# EAGLE board panel (EAGLE 5.11), part 1 of 3
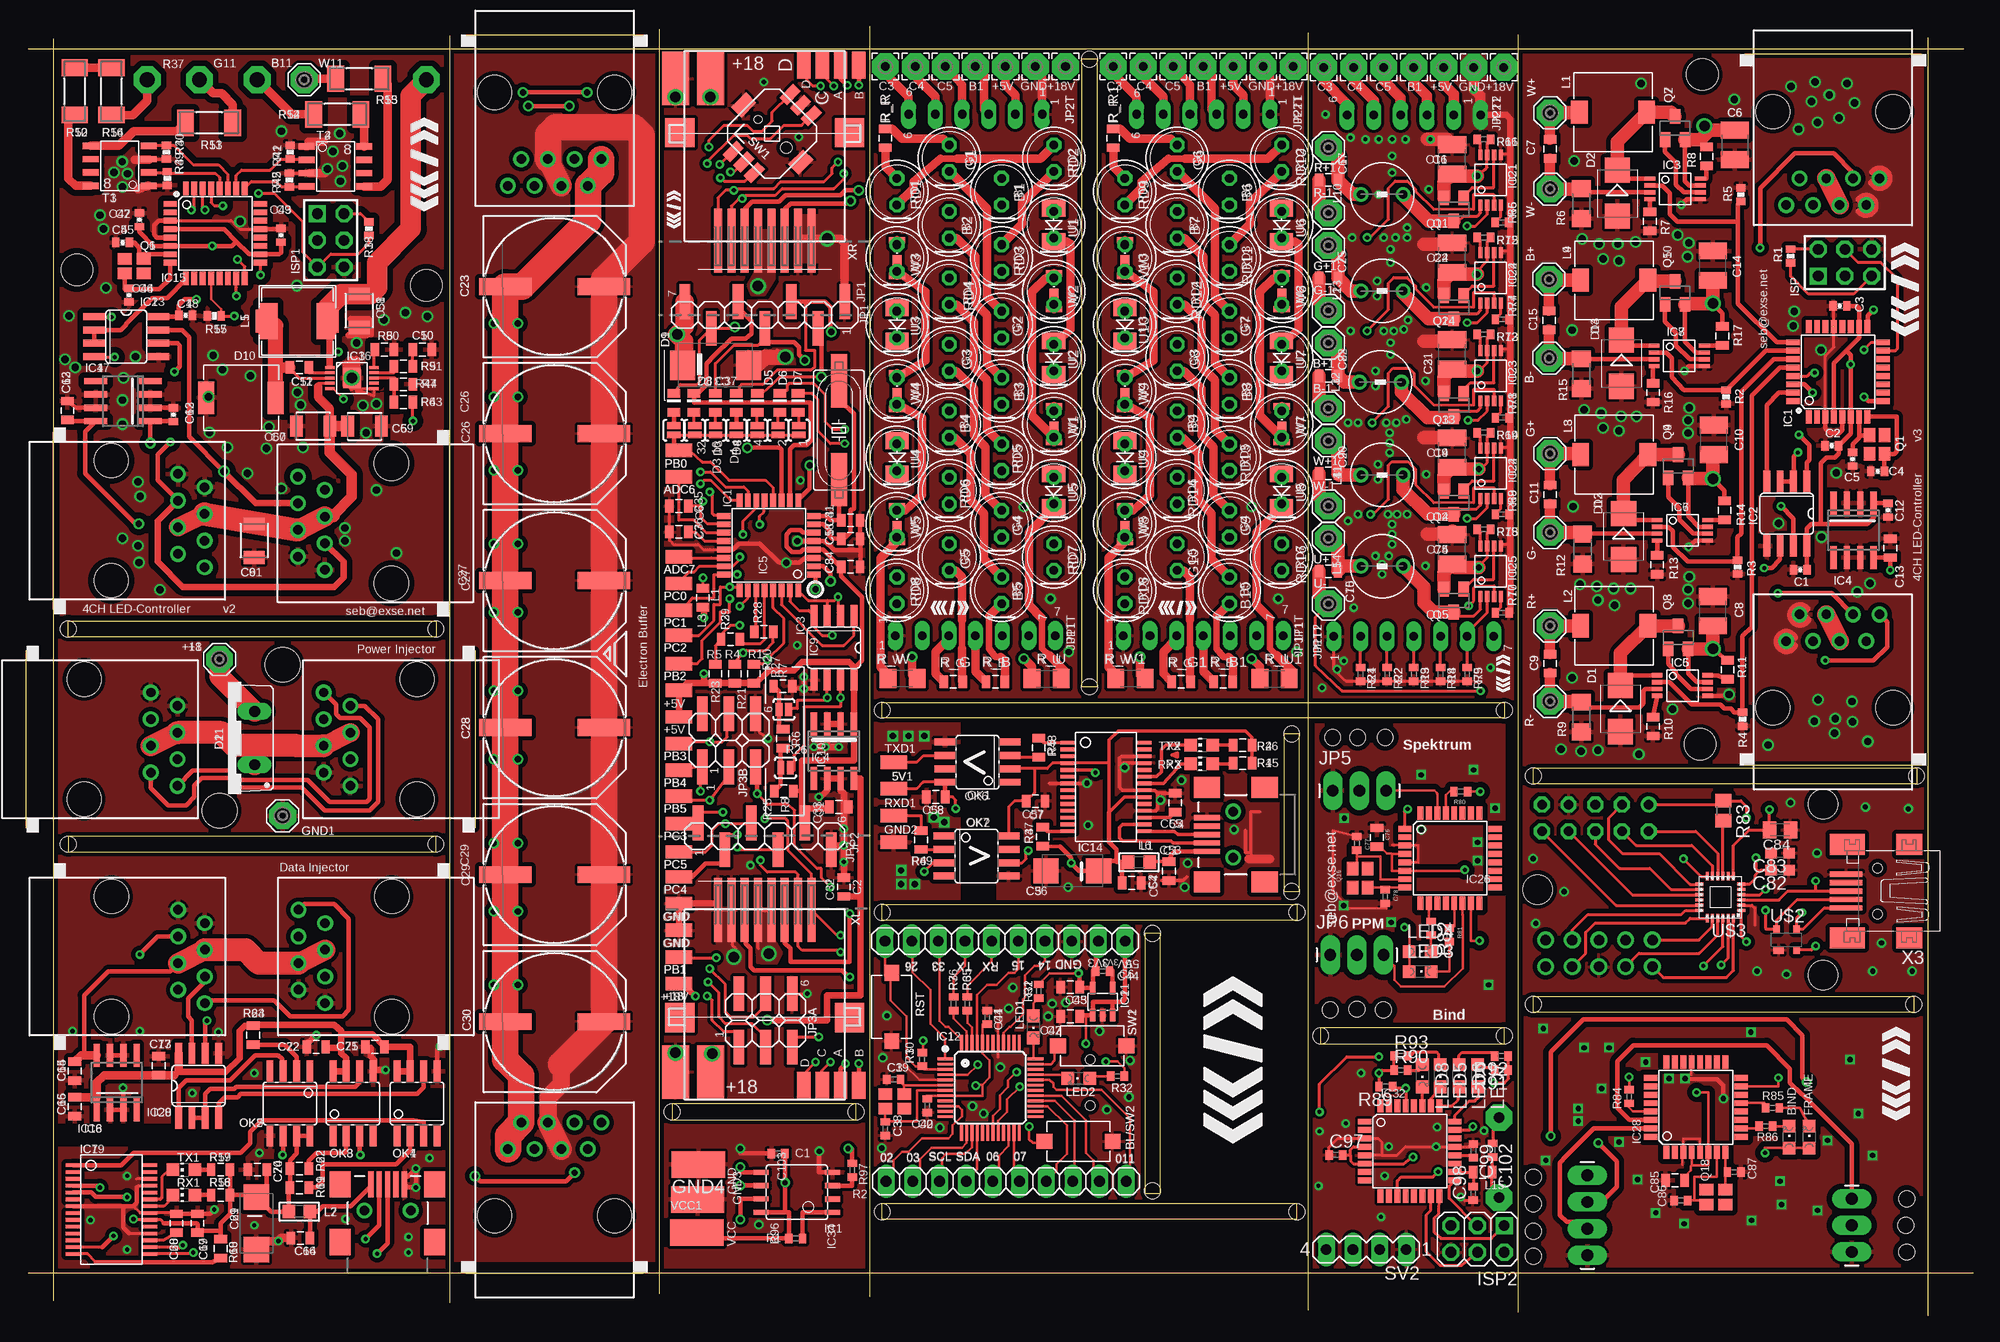
[diagram p0: board, top side]
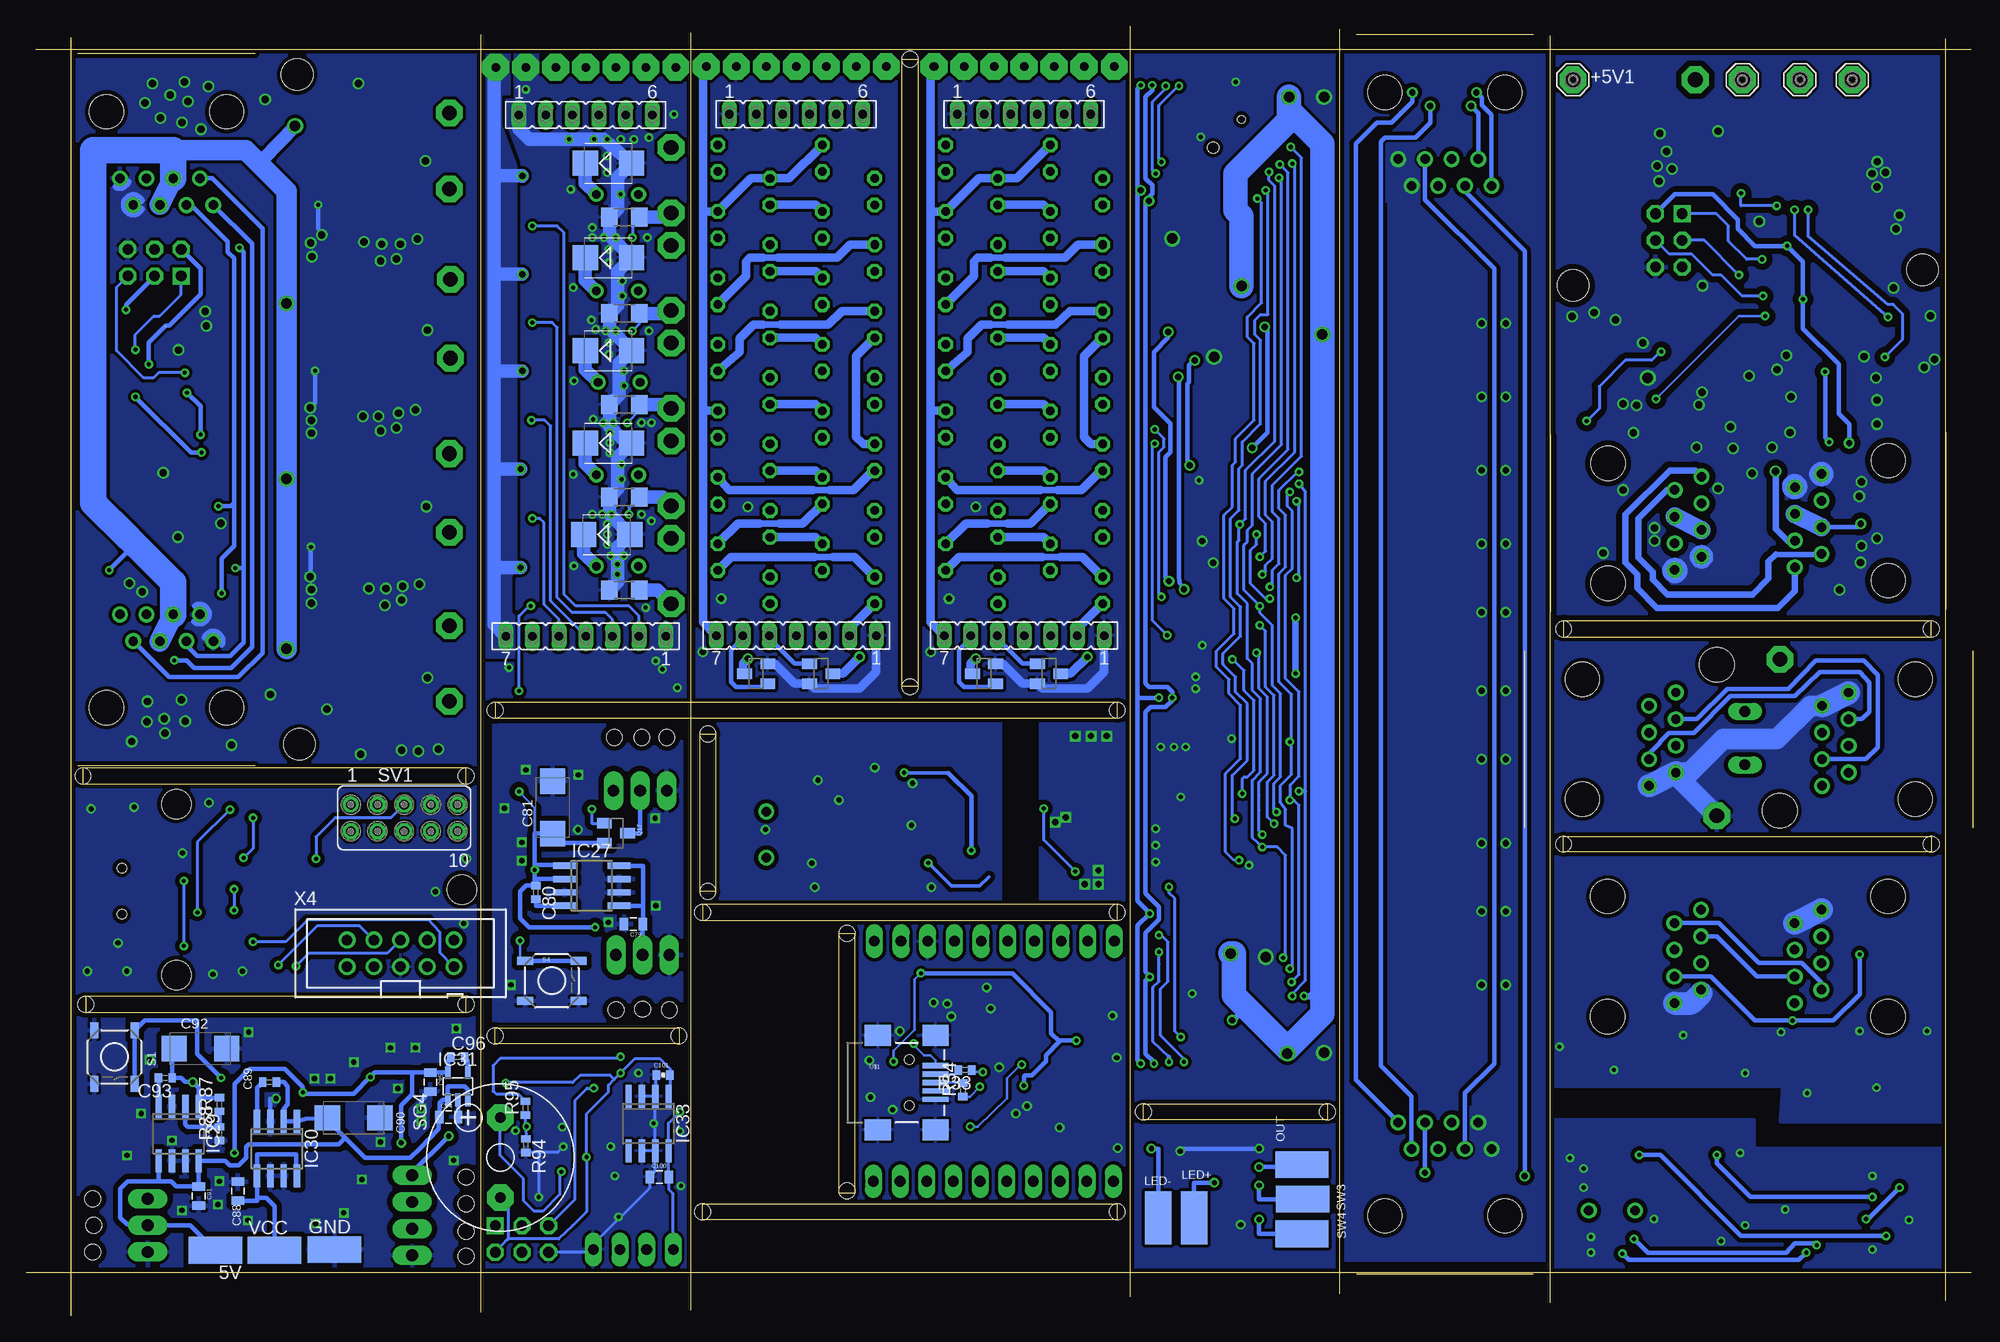
[diagram p1: board, bottom side, seen from below]

Size 185.41 x 122.8 mm. Coordinates in mm from the lower left corner, seen from the top.
Outline: 2.61,1.4 2.61,121.6
Outline: 40.31,121.9 40.31,1.2
Outline: 60.31,2.1 60.31,122.5
Outline: 80.31,122.8 80.31,1.8
Outline: 122.11,0.5 122.11,122.2
Outline: 184.51,120.6 0.21,120.6
Outline: 0.21,4.1 185.41,4.1
Outline: 142.11,0.3 142.11,122
Outline: 181.11,0 181.11,121.7
Outline: 143.51,52.15 180.01,52.15 180.01,50.65 143.51,50.65 143.51,52.15
Outline: 121.26,40.4 121.26,55.4 119.76,55.4 119.76,40.4 121.26,40.4
Outline: 121.01,37.65 81.51,37.65 81.51,39.15 121.01,39.15 121.01,37.65
Outline: 81.51,9.15 81.51,10.65 121.01,10.65 121.01,9.15 81.51,9.15
Outline: 61.51,18.65 79.01,18.65 79.01,20.15 61.51,20.15 61.51,18.65
Outline: 4.01,44.15 39.01,44.15 39.01,45.65 4.01,45.65 4.01,44.15
Outline: 4.01,66.15 39.01,66.15 39.01,64.65 4.01,64.65 4.01,66.15
Outline: 102.01,119.65 100.51,119.65 100.51,59.9 102.01,59.9 102.01,119.65
Outline: 81.51,58.4 140.76,58.4 140.76,56.9 81.51,56.9 81.51,58.4
Outline: 108.01,36.4 106.51,36.4 106.51,11.65 108.01,11.65 108.01,36.4
Outline: 123.26,25.9 140.76,25.9 140.76,27.4 123.26,27.4 123.26,25.9
Outline: 143.51,28.9 143.51,30.4 179.76,30.4 179.76,28.9 143.51,28.9
Copper layers (1*16): Top 0.035mm / dielectric 1.5mm / Bottom 0.035mm
Design rules "default *": minimum track width 0.2mm, minimum drill 0.4mm, track to track 0.2mm, track to pad 0.2mm, pad to pad 0.2mm, via to via 0.2mm, smd to smd 0mil, copper to edge 0.4mm, drill to drill 8mil, minimum pad ring 0.3mm, minimum via ring 8mil, stop-mask expansion 4mil, vias tented up to drill 40mil, thermal gap 10mil
Holes 3.3 mm at 18.41,48.1 24.41,62
Holes 3 mm at 38.11,98.1 4.81,99.6 159.41,54.4 159.61,118.2
Holes 1.5 mm at 124.17,29.12 126.72,29.2 129.25,29.12 124.41,55.07 126.79,55.07 129.41,55.07 179.07,6.06 179,8.6 179.07,11.14 143.51,5.66 143.51,8.04 143.51,10.66 143.51,13.2 4.01,65.4 39.01,65.4 4.01,44.9 39.01,44.9 61.51,19.4 79.01,19.4 81.51,9.9 121.01,9.9 81.51,38.4 121.01,38.4 120.51,40.4 120.51,55.4 143.51,51.4 180.01,51.4 107.26,11.9 107.26,36.4 81.51,57.65 140.76,57.65 101.26,59.9 101.26,119.65 123.26,26.65 140.76,26.65 143.51,29.65 179.76,29.65
Holes 2.8 mm at 171.13,48.72 171.13,32.45 143.93,40.59
tRestrict: 2 lines

## Footprints (pad centres in the part's own frame; a part is rotated, then mirrored left to right if it is on the bottom)
SMD2,54-5,08 = smd 2.54 x 5.08: 1 0,0
SMD1,27-2,54 = smd 1.27 x 2.54: 1 0,0
SE14 = drill 1.397 pad 2.54 octagon: MP 0,0
LED5MM = drill 0.813 octagon: A -1.27,0; K 1.27,0
CHIPLED_0805 = smd 1.2 x 1.2: A 0,-1.05; C 0,1.05
SWITCH_MCTAEF = smd 1.5 x 1.4: 1 -3.25,0; 2 3.25,0
0402-CAP = smd 0.7 x 0.9: 1 -0.65,0; 2 0.65,0
C1210 = smd 1.6 x 2.7: 1 -1.4,0; 2 1.4,0
0805 = smd 0.8 x 1.2: 1 -0.9,0; 2 0.9,0
PANASONIC_H13 = smd 5 x 1.6: + 4.7,0; - -4.7,0
SMC_D = smd 2.4 x 2.8: + -3.15,0; - 3.15,0
C0402 = smd 0.7 x 0.9: 1 -0.65,0; 2 0.65,0
1210 = smd 1.2 x 2: 1 -1.6,0; 2 1.6,0
SMC_C = smd 2.4 x 2.4: + -2.5,0; - 2.5,0
C0603 = smd 1.1 x 1: 1 -0.85,0; 2 0.85,0
C0805K = smd 1.3 x 1.6: 1 -1,0; 2 1,0
SMB = smd 2.4 x 2.4: A 2.2,0; C -2.2,0
DIODE_0805 = smd 0.8 x 1.2: 1 -0.9,0; 2 0.9,0
DO214AB = smd 1.52 x 3.07: A 3.305,0; K -3.305,0
TO220ACS = drill 1.016 long: A 2.54,-2.54; C -2.54,-2.54
TQFP32-08 = smd 1.27 x 0.559: 1 -4.293,2.8; 2 -4.293,2; 3 -4.293,1.2; 4 -4.293,0.4; 5 -4.293,-0.4; 6 -4.293,-1.2; 7 -4.293,-2; 8 -4.293,-2.8; 17 4.293,-2.8; 18 4.293,-2; 19 4.293,-1.2; 20 4.293,-0.4; 21 4.293,0.4; 22 4.293,1.2; 23 4.293,2; 24 4.293,2.8 | smd 0.559 x 1.27: 9 -2.8,-4.293; 10 -2,-4.293; 11 -1.2,-4.293; 12 -0.4,-4.293; 13 0.4,-4.293; 14 1.2,-4.293; 15 2,-4.293; 16 2.8,-4.293; 25 2.8,4.293; 26 2,4.293; 27 1.2,4.293; 28 0.4,4.293; 29 -0.4,4.293; 30 -1.2,4.293; 31 -2,4.293; 32 -2.8,4.293
SO08 = smd 0.66 x 2.032: 1 -1.905,-3.073; 2 -0.635,-3.073; 3 0.635,-3.073; 4 1.905,-3.073; 5 1.905,3.073; 6 0.635,3.073; 7 -0.635,3.073; 8 -1.905,3.073
MSOP8 = smd 0.41 x 1.02: 1 -0.975,-2.4; 2 -0.325,-2.4; 3 0.325,-2.4; 4 0.975,-2.4; 5 0.975,2.4; 6 0.325,2.4; 7 -0.325,2.4; 8 -0.975,2.4
SO08' = smd 0.6 x 2.2: 1 -1.905,-2.6; 2 -0.635,-2.6; 3 0.635,-2.6; 4 1.905,-2.6; 5 1.905,2.6; 6 0.635,2.6; 7 -0.635,2.6; 8 -1.905,2.6
SOT23-5L = smd 0.55 x 1.2: 1 -0.95,-1.3; 2 0,-1.3; 3 0.95,-1.3; 4 0.95,1.3; 5 -0.95,1.3
LQFP48 = smd 1.5 x 0.25: 1 -4.3,2.75; 2 -4.3,2.25; 3 -4.3,1.75; 4 -4.3,1.25; 5 -4.3,0.75; 6 -4.3,0.25; 7 -4.3,-0.25; 8 -4.3,-0.75; 9 -4.3,-1.25; 10 -4.3,-1.75; 11 -4.3,-2.25; 12 -4.3,-2.75; 25 4.3,-2.75; 26 4.3,-2.25; 27 4.3,-1.75; 28 4.3,-1.25; 29 4.3,-0.75; 30 4.3,-0.25; 31 4.3,0.25; 32 4.3,0.75; 33 4.3,1.25; 34 4.3,1.75; 35 4.3,2.25; 36 4.3,2.75 | smd 0.25 x 1.5: 13 -2.75,-4.3; 14 -2.25,-4.3; 15 -1.75,-4.3; 16 -1.25,-4.3; 17 -0.75,-4.3; 18 -0.25,-4.3; 19 0.25,-4.3; 20 0.75,-4.3; 21 1.25,-4.3; 22 1.75,-4.3; 23 2.25,-4.3; 24 2.75,-4.3; 37 2.75,4.3; 38 2.25,4.3; 39 1.75,4.3; 40 1.25,4.3; 41 0.75,4.3; 42 0.25,4.3; 43 -0.25,4.3; 44 -0.75,4.3; 45 -1.25,4.3; 46 -1.75,4.3; 47 -2.25,4.3; 48 -2.75,4.3
SSOP28DB = smd 0.348 x 1.397: 1 -4.225,-3.656; 2 -3.575,-3.656; 3 -2.925,-3.656; 4 -2.275,-3.656; 5 -1.625,-3.656; 6 -0.975,-3.656; 7 -0.325,-3.656; 8 0.325,-3.656; 9 0.975,-3.656; 10 1.625,-3.656; 11 2.275,-3.656; 12 2.925,-3.656; 13 3.575,-3.656; 14 4.225,-3.656; 15 4.225,3.656; 16 3.575,3.656; 17 2.925,3.656; 18 2.275,3.656; 19 1.625,3.656; 20 0.975,3.656; 21 0.325,3.656; 22 -0.325,3.656; 23 -0.975,3.656; 24 -1.625,3.656; 25 -2.275,3.656; 26 -2.925,3.656; 27 -3.575,3.656; 28 -4.225,3.656
MSOP10-PAD = smd 0.305 x 0.889: 1 -1,-2.095; 2 -0.5,-2.095; 3 0,-2.095; 4 0.5,-2.095; 5 1,-2.095; 6 1,2.095; 7 0.5,2.095; 8 0,2.095; 9 -0.5,2.095; 10 -1,2.095 | smd 1.88 x 1.68: PAD 0,0
SOIC8 = smd 0.6 x 2.2: 1 -1.905,-2.6; 2 -0.635,-2.6; 3 0.635,-2.6; 4 1.905,-2.6; 5 1.905,2.6; 6 0.635,2.6; 7 -0.635,2.6; 8 -1.905,2.6
8S2 = smd 0.5 x 1.4: 1 -1.905,-3.404; 2 -0.645,-3.404; 3 0.625,-3.404; 4 1.895,-3.404; 5 1.905,3.404; 6 0.635,3.404; 7 -0.635,3.404; 8 -1.905,3.404
AVR-ISP-6 = drill 1.016 square: 1 -2.54,-1.27 | drill 1.016 octagon: 2 -2.54,1.27; 3 0,-1.27; 4 0,1.27; 5 2.54,-1.27; 6 2.54,1.27
2X03 = drill 1.016 square: 1 -2.54,-1.27 | drill 1.016 octagon: 2 -2.54,1.27; 3 0,-1.27; 4 0,1.27; 5 2.54,-1.27; 6 2.54,1.27
1X07SMD-REVERSE = smd 1.016 x 3.302: 1 -1.27,-1.27; 2 1.27,1.27; 3 3.81,-1.27; 4 6.35,1.27; 5 8.89,-1.27; 6 11.43,1.27; 7 13.97,-1.27
FE07 = drill 0.813 long: 1 -7.62,0; 2 -5.08,0; 3 -2.54,0; 4 0,0; 5 2.54,0; 6 5.08,0; 7 7.62,0
1X06SMD = smd 1.016 x 3.302: 1 -1.27,1.27; 2 1.27,-1.27; 3 3.81,1.27; 4 6.35,-1.27; 5 8.89,1.27; 6 11.43,-1.27
FE06 = drill 0.813 long: 1 -6.35,0; 2 -3.81,0; 3 -1.27,0; 4 1.27,0; 5 3.81,0; 6 6.35,0
1X10 = drill 1.016 long: 1 -11.43,0; 2 -8.89,0; 3 -6.35,0; 4 -3.81,0; 5 -1.27,0; 6 1.27,0; 7 3.81,0; 8 6.35,0; 9 8.89,0; 10 11.43,0
2X03SMD = smd 1.016 x 3.302: 1 -1.27,-3.81; 2 -1.27,1.27; 3 1.27,-3.81; 4 1.27,1.27; 5 3.81,-3.81; 6 3.81,1.27
1X03_LONGPADS = drill 1.118 pad 1.88 long: 1 0,0; 2 2.54,0; 3 5.08,0
PIS2816 = smd 2.2 x 1.6: P$1 0,3.2; P$2 0,-3.2
IHLP-2525CZ = smd 1.83 x 3.43: P$1 -2.77,0; P$2 2.77,0
X22 = smd 1.3 x 1.1: 1 0.9,0.7; 2 -0.9,0.7; 3 -0.9,-0.7; 4 0.9,-0.7
RLF7030 = smd 2 x 2.2: P$1 -2.95,0; P$2 2.95,0
L0805 = smd 1.2 x 1.3: 1 -1.016,0; 2 1.016,0
WE-TI_S/M = drill 0.813 round: 1 -2,0; 2 2,0
SOIC08 = smd 0.66 x 2.032: 1 -1.905,-3.073; 2 -0.635,-3.073; 3 0.635,-3.073; 4 1.905,-3.073; 5 1.905,3.073; 6 0.635,3.073; 7 -0.635,3.073; 8 -1.905,3.073
2,54/0,8 = drill 0.813 pad 2.54 octagon: 1 0,0
SOT23 = smd 1 x 1.4: 1 -0.95,-1.1; 2 0.95,-1.1; 3 0,1.1
0402-RES = smd 0.7 x 0.9: 1 -0.65,0; 2 0.65,0
R1206 = smd 1.6 x 1.803: 1 -1.422,0; 2 1.422,0
R0402 = smd 0.7 x 0.9: 1 -0.65,0; 2 0.65,0
MINI_MELF-0207R = smd 1.6 x 2.5: 1 -2.25,0; 2 2.25,0
R0805 = smd 1.3 x 1.5: 1 -0.95,0; 2 0.95,0
1206 = smd 1.6 x 1.8: 1 -1.4,0; 2 1.4,0
CHIP-LED0805 = smd 1.2 x 1.2: A 0,-1.05; C 0,1.05
TACTILE_SWITCH_SMD = smd 1.524 x 0.762: 1 -2.54,1.905; 2 2.54,1.905; 3 -2.54,-1.905; 4 2.54,-1.905
F/CM12P = drill 1.016 pad 2.54 octagon: + 3.81,0; - -3.81,0
SJ_2S-NO = smd 0.635 x 1.27: 1 -0.45,0; 2 0.45,0
1X04_LONGPADS = drill 1.118 pad 1.88 long: 1 0,0; 2 2.54,0; 3 5.08,0; 4 7.62,0
FE05-2 = drill 0.914 round: 1 -5.08,1.27 | drill 0.914 octagon: 2 -5.08,-1.27; 3 -2.54,1.27; 4 -2.54,-1.27; 5 0,1.27; 6 0,-1.27; 7 2.54,1.27; 8 2.54,-1.27; 9 5.08,1.27; 10 5.08,-1.27
MA04-1 = drill 1.016 long: 1 -3.81,0; 2 -1.27,0; 3 1.27,0; 4 3.81,0
MCMT5-F-V_ADAPTED = smd 1.858 x 1: 1 -3.829,1.425; 2 -3.829,0; 3 -3.829,-1.425; 4 3.829,1.425; 5 3.829,0; 6 3.829,-1.425 | smd 2 x 1.394: TAB1 0,3.847; TAB2 0,-3.847 | hole 1.05: 0,-1.9 | hole 0.75: 0,1.9
SO-8 = smd 1.524 x 0.61: 1 -2.743,1.27; 2 -2.743,0; 3 -2.743,-1.27; 4 -2.743,-2.54; 5 2.743,-2.54; 6 2.743,-1.27; 7 2.743,0; 8 2.743,1.27
PLCC2 = smd 1.6 x 2.2: P$1 -1.6,0; P$2 1.6,0
USB-MINIB = smd 2.5 x 0.5: D+ 2.5,0; D- 2.5,0.8; GND 2.5,-1.6; ID 2.5,-0.8; VBUS 2.5,1.6 | smd 2.5 x 2: MTN1 -3,4.5; MTN2 2.5,4.5; MTN3 -3,-4.5; MTN4 2.5,-4.5 | hole 0.9: 0,2.2; 0,-2.2
SOT143-R = smd 1 x 0.7: 1 -0.75,-1 | smd 0.6 x 0.7: 2 0.95,-1; 3 0.95,1; 4 -0.95,1
S-PQFP-N24(RGE) = smd 0.8 x 0.3: 1 -2.5,1.75; 2 -2.5,1.25; 3 -2.5,0.75; 4 -2.5,0.25; 5 -2.5,-0.25; 6 -2.5,-0.75; 13 1.5,-0.75; 14 1.5,-0.25; 15 1.5,0.25; 16 1.5,0.75; 17 1.5,1.25; 18 1.5,1.75 | smd 0.3 x 0.8: 7 -1.75,-1.5; 8 -1.25,-1.5; 9 -0.75,-1.5; 10 -0.25,-1.5; 11 0.25,-1.5; 12 0.75,-1.5; 19 0.75,2.5; 20 0.25,2.5; 21 -0.25,2.5; 22 -0.75,2.5; 23 -1.25,2.5; 24 -1.75,2.5
NICHIA_NSSL157T-H3 = smd 0.64 x 0.86: A@1 1.08,0 | smd 0.6 x 1.55: A@2 1.7,0; K@1 -1.7,0 | smd 1.66 x 0.86: K@2 -0.57,0
RJ45-NO-SHIELD = drill 0.9 pad 1.4 round: 1 -4.445,6.35; 2 -3.175,8.89; 3 -1.905,6.35; 4 -0.635,8.89; 5 0.635,6.35; 6 1.905,8.89; 7 3.175,6.35; 8 4.445,8.89 | hole 3.251: -5.715,0; 5.715,0
32005-301 = smd 3.1 x 0.5: 1 3,1.6; 2 3,0.8; 3 3,0; 4 3,-0.8; 5 3,-1.6 | smd 2.5 x 2: M1 -3,-4.45; M2 -3,4.45 | smd 3.3 x 2: M3 2.9,4.45; M4 2.9,-4.45 | hole 0.9: 0,2.2; 0,-2.2
PAK100/2500-10 = drill 1 pad 1.422 round: 1 -5.08,-1.27; 2 -5.08,1.27; 3 -2.54,-1.27; 4 -2.54,1.27; 5 0,-1.27; 6 0,1.27; 7 2.54,-1.27; 8 2.54,1.27; 9 5.08,-1.27; 10 5.08,1.27
HC49UP-SMALL = smd 5.08 x 1.524: 1 -4.699,0; 2 4.699,0
USB-MINIB-NOSTOP = smd 2.5 x 0.5: D+ 2.5,0; D- 2.5,0.8; GND 2.5,-1.6; ID 2.5,-0.8; VBUS 2.5,1.6 | smd 2.5 x 2: G1 -3,-4.5; G2 -3,4.5; G3 2.5,4.5; G4 2.5,-4.5 | drill 0.9 pad 0.8 round: H1 0,2.2 | drill 0.9 pad 0.787 round: H2 0,-2.2
85502-5008-SMALL = smd 6.096 x 0.762: 1 10.211,4.445; 2 10.211,3.175; 3 10.211,1.905; 4 10.211,0.635; 5 10.211,-0.635; 6 10.211,-1.905; 7 10.211,-3.175; 8 10.211,-4.445 | smd 2.794 x 2.794: P$1 -0.076,-8.077; P$2 -0.076,8.077

## Placement (x,y rotation side)
5V  [SMD2,54-5,08]  167.41,6.21 90 bottom
5V1  [SMD1,27-2,54]  82.61,50.17 270 top
+1  SE14  [SE14]  18.41,62.5 0 top
+5V1  SE14  [SE14]  38.11,117.7 0 bottom
+18_L  [SMD2,54-5,08]  65.16,23.2 180 top
+18_R  [SMD2,54-5,08]  65.16,117.82 180 top
A_L  [SMD1,27-2,54]  77.54,21.93 180 top
A_R  [SMD1,27-2,54]  77.54,119.09 180 top
ADC6  WIREPADSMD1,27-254  [SMD1,27-2,54]  62.15,79.88 90 top
ADC7  WIREPADSMD1,27-254  [SMD1,27-2,54]  62.15,72.26 270 top
B1  [LED5MM]  92.88,107.06 270 top
B2  [LED5MM]  87.9,103.89 270 top
B3  [LED5MM]  92.88,88.07 270 top
B4  [LED5MM]  87.9,84.9 270 top
B5  [LED5MM]  92.88,69.08 270 top
B6  [LED5MM]  114.58,107.06 270 top
B7  [LED5MM]  109.6,103.89 270 top
B8  [LED5MM]  114.58,88.07 270 top
B9  [LED5MM]  109.6,84.9 270 top
B10  [LED5MM]  114.58,69.08 270 top
B11  SE14  [SE14]  21.98,117.7 0 bottom
B+  SE14  [SE14]  145.01,98.7 90 top
B+1  SE14  [SE14]  124.01,92.64 270 top
B-  SE14  [SE14]  145.01,91.2 90 top
B-1  SE14  [SE14]  124.01,86.41 270 top
B_L  [SMD1,27-2,54]  79.29,21.93 180 top
B_R  [SMD1,27-2,54]  79.29,119.09 180 top
BIND  [CHIPLED_0805]  167.88,17.01 0 top
BL/SW2  SWITCH_MCTAEF  [SWITCH_MCTAEF]  100.21,16.6 180 top
C  WIREPADSMD1,27-254  [SMD1,27-2,54]  75.8,119.09 180 top
C1  100nF  [0402-CAP]  168.94,71.05 180 top
C2  100nF  [0402-CAP]  171.95,82.86 180 top
C3  100nF  [0402-CAP]  172.72,96.15 180 top
C4  22pF  [0402-CAP]  176.3,80.42 0 top
C5  22pF  [0402-CAP]  173.92,81.56 90 top
C6  2.2µF / 50V  [C1210]  162.71,111.5 270 top
C7  1µF  [0805]  145.11,111.1 90 top
C8  2.2µF / 50V  [C1210]  160.61,67.1 90 top
C9  1µF  [0805]  145.11,62.1 90 top
C10  2.2µF / 50V  [C1210]  160.71,83.4 90 top
C11  1µF  [0805]  145.11,78.2 90 top
C12  100nF  [0402-CAP]  177.31,76.7 90 top
C13  1µF  [0805]  177.51,73.1 270 top
C14  2.2µF / 50V  [C1210]  160.61,100 90 top
C15  1µF  [0805]  145.01,94.8 90 top
C16  2.2µF / 50V  [C1210]  135.79,110.13 90 top
C17  1µF  [0805]  124.01,108.16 0 top
C18  22p  [0805]  78.5,75.75 180 top
C19  2.2µF / 50V  [C1210]  135.79,82.19 90 top
C20  1µF  [0805]  124.01,80.22 0 top
C21  2.2µF / 50V  [C1210]  135.79,91.56 90 top
C22  1µF  [0805]  124.01,89.51 0 top
C23  [PANASONIC_H13]  50.31,98 0 top
C24  2.2µF / 50V  [C1210]  135.79,100.77 90 top
C25  1µF  [0805]  124.01,98.83 0 top
C26  [PANASONIC_H13]  50.31,84 0 top
C27  [PANASONIC_H13]  50.31,70 0 top
C28  [PANASONIC_H13]  50.31,56 0 top
C29  [PANASONIC_H13]  50.31,42 0 top
C30  [PANASONIC_H13]  50.31,28 0 top
C31  22p  [0805]  78.5,74 180 top
C32  1u  [0805]  77.86,40.82 90 top
C33  100n  [0805]  77.39,48.44 0 top
C34  100n  [0805]  78.5,71.3 0 top
C35  100n  [0805]  62.15,77.1 0 top
C36  100n  [0805]  62.15,74.64 0 top
C37  [SMC_D]  65.64,90.51 0 top
C38  22pF  [C0402]  81.81,17.8 90 top
C39  22pF  [C0402]  82.61,22.5 0 top
C40  100nF  [C0402]  85.81,20 90 top
C41  100nF  [C0402]  91.51,28.4 270 top
C42  1µF  [0805]  99.41,28.5 180 top
C43  10µF  [0805]  99.41,31.3 180 top
C44  10nF  [C0402]  102.51,32.8 0 top
C45  22pF  [0402-CAP]  9.17,102.19 0 top
C46  22pF  [0402-CAP]  9.79,97.19 90 top
C47  100nF  [0402-CAP]  10.77,104.36 90 top
C48  100nF  [0402-CAP]  15.18,95.25 0 top
C49  100nF  [0402-CAP]  24.26,102.89 90 top
C50  680pF  [0805]  37.71,92 180 top
C51  47µF 16V  [1210]  31.71,95.7 270 top
C52  1µF  [0805]  26.01,90.3 0 top
C53  10nF  [0805]  108.82,42.34 270 top
C54  100nF  [0805]  105.26,41.21 0 top
C55  100nF  [0805]  109.4,48.84 90 top
C56  4.7µF  [SMC_C]  99.62,42.36 180 top
C57  100nF  [0805]  96.11,49 180 top
C58  100nF  [0805]  86.61,49.4 180 top
C59  4.7µF 50V  [1210]  32.21,84.7 0 top
C60  4.7µF 50V  [1210]  27.31,84.7 180 top
C61  4.7µF 50V  [1210]  21.71,73.8 270 top
C62  1µF  [0805]  3.91,86.2 270 top
C63  100nF  [0402-CAP]  14.01,85.8 270 top
C64  1uF  [0805]  4.61,23.3 90 top
C65  100nF  [0805]  4.61,19.9 90 top
C66  10nF  [0805]  26.11,7.4 180 top
C67  100nF  [0805]  16.31,8.8 90 top
C68  100nF  [0805]  14.31,8.8 90 top
C69  4.7µF  [SMC_C]  21.91,8.8 270 top
C70  100nF  [0805]  22.01,13.9 0 top
C71  100nF  [0805]  33.21,25.6 180 top
C72  100nF  [0805]  27.61,25.6 180 top
C73  100nF  [0805]  12.61,23.8 90 top
C74  2.2µF / 50V  [C1210]  135.79,72.98 90 top
C75  1µF  [0805]  124.01,70.89 0 top
C76  100n  [0805]  128.62,45.55 90 top
C77  22n  [C0402]  126.72,44.99 270 top
C78  22n  [C0402]  129.41,39.91 90 top
C79  1µF  [0805]  127.59,37.29 180 bottom
C80  10nF  [C0402]  136.87,40.31 270 bottom
C81  [SMC_C]  135.29,48.41 90 bottom
C82  [C0603]  167.01,42.44 180 top
C83  [C0603]  167.01,44.06 180 top
C84  [C0805K]  167,46.27 180 top
C85  100n  [0805]  157.01,12.88 180 top
C86  22p  [C0402]  157.56,10.98 0 top
C87  22p  [C0402]  162.64,13.67 180 top
C88  1µF  [0805]  165.26,11.85 90 bottom
C89  10nF  [C0402]  162.25,22.25 180 bottom
C90  10µF  [SMC_C]  154.23,18.83 0 bottom
C91  1µF  [0805]  168.99,11.37 270 bottom
C92  10µF  [SMC_C]  168.84,25.42 0 bottom
C93  10nF  [C0402]  172.17,22.64 180 bottom
C94  1µF  [0805]  145.18,18.91 0 bottom
C95  10µF  [0805]  146.93,22.25 270 bottom
C96  10nF  [C0402]  144.31,24.63 0 bottom
C97  [C0402]  124.71,15.31 0 top
C98  [C0402]  137.78,11.65 90 top
C99  [C0402]  137.81,15.7 270 top
C100  1µF  [0805]  125.12,13.21 0 bottom
C101  100nF  [0402-CAP]  124.76,22.91 0 bottom
C102  [C0402]  139.62,15.76 270 top
C103  [C0402]  71.6,15.45 0 top
C_L  WIREPADSMD1,27-254  [SMD1,27-2,54]  75.8,21.93 180 top
D  WIREPADSMD1,27-254  [SMD1,27-2,54]  74.05,119.09 180 top
D1  MBRS140  [SMB]  151.81,57.8 270 top
D2  MBRS140  [SMB]  151.51,106.9 270 top
D3  [DIODE_0805]  65.64,86.94 270 top
D4  [DIODE_0805]  67.62,86.94 270 top
D5  [DIODE_0805]  69.61,86.94 270 top
D6  [DIODE_0805]  71.75,86.94 270 top
D7  [DIODE_0805]  73.5,86.94 270 top
D8  [DIODE_0805]  63.57,86.94 270 top
D9  [DIODE_0805]  61.67,86.94 270 top
D10  MBRS340  [DO214AB]  20.46,87.41 180 top
D11  [TO220ACS]  19.21,55 90 top
D12  MBRS140  [SMB]  152.11,74.2 270 top
D13  MBRS140  [SMB]  151.91,90.7 270 top
D14  MBRS140  [SMB]  129.98,109.76 0 bottom
D15  MBRS140  [SMB]  129.98,83.09 0 bottom
D16  MBRS140  [SMB]  129.98,91.91 0 bottom
D17  MBRS140  [SMB]  129.98,100.75 0 bottom
D18  MBRS140  [SMB]  130.14,74.39 0 bottom
D_L  WIREPADSMD1,27-254  [SMD1,27-2,54]  74.05,21.93 0 top
FRAME  [CHIPLED_0805]  169.79,17.01 0 top
G1  [LED5MM]  87.9,110.22 270 top
G2  [LED5MM]  92.88,94.4 270 top
G3  [LED5MM]  87.9,91.23 270 top
G4  [LED5MM]  92.88,75.41 270 top
G5  [LED5MM]  87.9,72.24 270 top
G6  [LED5MM]  109.6,110.22 270 top
G7  [LED5MM]  114.58,94.4 270 top
G8  [LED5MM]  109.6,91.23 270 top
G9  [LED5MM]  114.58,75.41 270 top
G10  [LED5MM]  109.6,72.24 270 top
G11  SE14  [SE14]  16.5,117.7 0 bottom
G+  SE14  [SE14]  145.11,82.1 90 top
G+1  SE14  [SE14]  124.01,101.93 270 top
G-  SE14  [SE14]  145.11,74.6 90 top
G-1  SE14  [SE14]  124.01,95.74 270 top
GND  [SMD2,54-5,08]  156.06,6.29 270 bottom
GND1  SE14  [SE14]  24.41,47.6 0 top
GND2  [SMD1,27-2,54]  82.61,45.09 270 top
GND3  [SMD2,54-5,08]  63.93,11.06 270 top
GND4  [SMD2,54-5,08]  64.01,14.4 90 top
GND_L  [SMD2,54-5,08]  61.83,23.2 180 top
GND_R  [SMD2,54-5,08]  61.83,117.82 180 top
IC1  MEGA48/88/168-AU  [TQFP32-08]  172.54,89.9 90 top
IC2  MAX487CSA  [SO08]  167.65,76.38 180 top
IC3  LM3401  [MSOP8]  157.01,107.3 270 top
IC4  78L05SMD  [SO08']  174.01,74.8 180 top
IC5  MEGA8-AI  [TQFP32-08]  70.72,73.37 180 top
IC6  LM3401  [MSOP8]  157.71,60 270 top
IC7  LM3401  [MSOP8]  157.71,74.8 270 top
IC8  LM3401  [MSOP8]  157.41,91.4 270 top
IC9  MAX487  [SO08]  76.91,63.6 180 top
IC10  78L05  [SO08']  76.91,53.76 180 top
IC11  LT1761  [SOT23-5L]  102.51,29.9 0 top
IC12  [LQFP48]  91.81,21.7 0 top
IC13  MAX487CSA  [SO08]  9.53,93.24 270 top
IC14  FT232RL  [SSOP28DB]  102.82,50.35 270 top
IC15  MEGA48/88/168-AU  [TQFP32-08]  18.01,103.07 0 top
IC16  LT3972  [MSOP10-PAD]  31.01,89.3 270 top
IC17  78L05SMD  [SO08']  9.21,87.1 90 top
IC18  78L05  [SO08']  8.61,22.2 0 top
IC19  FT232RL  [SSOP28DB]  8.11,10.1 270 top
IC20  MAX487  [SO08]  16.41,21.9 0 top
IC21  LM3401  [MSOP8]  139.45,108.16 0 top
IC22  LM3401  [MSOP8]  139.45,80.22 0 top
IC23  LM3401  [MSOP8]  139.45,89.51 0 top
IC24  LM3401  [MSOP8]  139.45,98.83 0 top
IC25  LM3401  [MSOP8]  139.45,70.89 0 top
IC26  atmega88  [TQFP32-08]  135.58,43.56 0 top
IC27  LT1763CS8-3.3  [SOIC8]  131.56,40.94 270 bottom
IC28  atmega88  [TQFP32-08]  158.99,19.84 90 top
IC29  LT1763CS8-ADJ  [SOIC8]  170.9,17.33 180 bottom
IC30  LT1763CS8-5  [SOIC8]  161.53,15.9 180 bottom
IC31  LT1761  [SOT23-5L]  144.31,21.85 0 bottom
IC32  MEGA48/88/168-AU  [TQFP32-08]  131.76,15.68 0 top
IC33  78L05SMD  [SO08']  126.15,18.29 180 bottom
IC34  TINY13V-10SU  [8S2]  73.37,11.75 90 top
ISP  AVR-ISP-6  [AVR-ISP-6]  173.2,100.28 0 top
ISP1  AVR-ISP-6  [AVR-ISP-6]  28.99,102.42 270 top
ISP2  ISP  [2X03]  138.21,7.3 180 top
JP1  [1X07SMD-REVERSE]  76.68,95.31 180 top
JP1T  [FE07]  90.39,64.77 180 bottom
JP1T1  [FE07]  112.09,64.77 180 bottom
JP1T2  [FE07]  132.14,64.7 180 bottom
JP2  [1X06SMD]  75.41,45.65 180 top
JP2T  [FE06]  90.39,114.42 0 bottom
JP2T1  [FE06]  112.09,114.42 0 bottom
JP2T2  [FE06]  132.14,114.35 0 bottom
JP3  [1X10]  93.31,12.79 180 top
JP3A  ISP_A  [2X03SMD]  69.13,29.39 0 top
JP3B  ISP_B  [2X03SMD]  65.64,56.06 0 top
JP4  [1X10]  93.21,35.65 0 top
JP5  [1X03_LONGPADS]  124.41,49.99 0 top
JP6  [1X03_LONGPADS]  124.17,34.36 0 top
L1  33µH / 1A  [PIS2816]  151.11,114.6 270 top
L1A1  8.2µH  [IHLP-2525CZ]  25.81,94.7 180 top
L2  33µH / 1A  [PIS2816]  151.21,65.7 270 top
L3  10uH  [0805]  64.45,68.37 90 top
L4  [X22]  82.7,20.41 180 top
L5  3,3µH  [RLF7030]  25.81,94.7 180 top
L6  BEAD  [L0805]  105.96,43.17 180 top
L7  BEAD  [L0805]  26.01,9.9 180 top
L8  33µH / 1A  [PIS2816]  151.21,82 270 top
L9  33µH / 1A  [PIS2816]  151.21,98.6 270 top
L10  33µH / 1A  [WE-TI_S/M]  129.11,106.78 0 top
L11  33µH / 1A  [WE-TI_S/M]  129.11,80.06 0 top
L12  33µH / 1A  [WE-TI_S/M]  128.96,88.9 0 top
L13  33µH / 1A  [WE-TI_S/M]  129.11,97.59 0 top
L14  33µH / 1A  [WE-TI_S/M]  129.11,71.38 0 top
L15  L0805  [0805]  138.69,13.67 180 top
LED1  [CHIPLED_0805]  95.91,27.5 180 top
LED2  [CHIPLED_0805]  100.21,22.6 90 top
LED3  [CHIPLED_0805]  132.75,32.77 270 top
LED4  [CHIPLED_0805]  132.75,34.67 270 top
LED5  [CHIPLED_0805]  134.66,22.84 180 top
LED6  [CHIPLED_0805]  136.44,22.84 180 top
LED7  [CHIPLED_0805]  138.22,22.84 180 top
LED8  [CHIPLED_0805]  132.95,22.84 180 top
LED+  [SMD2,54-5,08]  74.19,9.32 0 bottom
LED-  [SMD2,54-5,08]  77.61,9.32 0 bottom
OK4  HCPL0601  [SOIC08]  37.21,20.2 0 top
OK5  HCPL0601  [SOIC08]  25.11,20.2 180 top
OK6  HCPL0601  [SOIC08]  90.59,52.71 90 top
OK7  HCPL0601  [SOIC08]  90.49,43.77 270 top
OK8  HCPL0601  [SOIC08]  31.11,20.2 0 top
OUT  [SMD2,54-5,08]  63.93,14.38 270 bottom
P+5T  WIREPAD2,54/0,8  [2,54/0,8]  93.25,118.96 270 top
P+5T1  WIREPAD2,54/0,8  [2,54/0,8]  114.95,118.96 270 top
P+5T2  WIREPAD2,54/0,8  [2,54/0,8]  134.99,118.89 270 top
P+18T  WIREPAD2,54/0,8  [2,54/0,8]  98.96,118.96 270 top
P+18T1  WIREPAD2,54/0,8  [2,54/0,8]  120.66,118.96 270 top
P+18T2  WIREPAD2,54/0,8  [2,54/0,8]  140.71,118.89 270 top
PAD1  WIREPADSMD1,27-254  [SMD1,27-2,54]  62.15,36.7 90 top
PAD2  WIREPADSMD1,27-254  [SMD1,27-2,54]  62.15,31.62 90 top
PAD3  WIREPADSMD1,27-254  [SMD1,27-2,54]  62.15,59.56 90 top
PAD4  WIREPADSMD1,27-254  [SMD1,27-2,54]  62.15,57.02 90 top
PAD5  WIREPADSMD1,27-254  [SMD1,27-2,54]  62.15,39.24 90 top
PB0  WIREPADSMD1,27-254  [SMD1,27-2,54]  62.15,82.42 270 top
PB1  WIREPADSMD1,27-254  [SMD1,27-2,54]  62.15,34.16 270 top
PB1T  WIREPAD2,54/0,8  [2,54/0,8]  90.39,118.96 270 top
PB1T1  WIREPAD2,54/0,8  [2,54/0,8]  112.09,118.96 270 top
PB1T2  WIREPAD2,54/0,8  [2,54/0,8]  132.14,118.89 270 top
PB2  WIREPADSMD1,27-254  [SMD1,27-2,54]  62.15,62.1 270 top
PB3  WIREPADSMD1,27-254  [SMD1,27-2,54]  62.15,54.48 270 top
PB4  WIREPADSMD1,27-254  [SMD1,27-2,54]  62.15,51.94 270 top
PB5  WIREPADSMD1,27-254  [SMD1,27-2,54]  62.15,49.48 270 top
PC0  WIREPADSMD1,27-254  [SMD1,27-2,54]  62.15,69.72 90 top
PC1  WIREPADSMD1,27-254  [SMD1,27-2,54]  62.15,67.18 90 top
PC2  WIREPADSMD1,27-254  [SMD1,27-2,54]  62.15,64.79 90 top
PC3  WIREPADSMD1,27-254  [SMD1,27-2,54]  62.15,46.86 90 top
PC3T  WIREPAD2,54/0,8  [2,54/0,8]  81.82,118.96 270 top
PC3T1  WIREPAD2,54/0,8  [2,54/0,8]  103.52,118.96 270 top
PC3T2  WIREPAD2,54/0,8  [2,54/0,8]  123.56,118.89 270 top
PC4  WIREPADSMD1,27-254  [SMD1,27-2,54]  62.15,41.78 90 top
PC4T  WIREPAD2,54/0,8  [2,54/0,8]  84.68,118.96 270 top
PC4T1  WIREPAD2,54/0,8  [2,54/0,8]  106.38,118.96 270 top
PC4T2  WIREPAD2,54/0,8  [2,54/0,8]  126.42,118.89 270 top
PC5  WIREPADSMD1,27-254  [SMD1,27-2,54]  62.15,44.16 90 top
PC5T  WIREPAD2,54/0,8  [2,54/0,8]  87.53,118.96 270 top
PC5T1  WIREPAD2,54/0,8  [2,54/0,8]  109.23,118.96 270 top
PC5T2  WIREPAD2,54/0,8  [2,54/0,8]  129.28,118.89 270 top
PGNDT1  WIREPAD2,54/0,8  [2,54/0,8]  96.11,118.96 270 top
PGNDT2  WIREPAD2,54/0,8  [2,54/0,8]  117.81,118.96 270 top
PGNDT3  WIREPAD2,54/0,8  [2,54/0,8]  137.85,118.89 270 top
Q1  20MHz  [X22]  176.25,82.97 270 top
Q2  BSS138  [SOT23]  94.2,61.15 90 bottom
Q3  BSS138  [SOT23]  88.01,61.15 270 bottom
Q4  BSS138  [SOT23]  115.9,61.15 90 bottom
Q5  BSS138  [SOT23]  109.71,61.15 270 bottom
Q6  20MHz  [X22]  10.28,99.96 180 top
Q7  MOSFET-PCHANNEL  [SOT23]  157.01,113.1 0 top
Q8  MOSFET-PCHANNEL  [SOT23]  157.31,64.6 0 top
Q9  MOSFET-PCHANNEL  [SOT23]  157.31,80.9 0 top
Q10  MOSFET-PCHANNEL  [SOT23]  157.01,97.4 0 top
Q11  MOSFET-PCHANNEL  [SOT23]  135.95,105.36 180 top
Q12  MOSFET-PCHANNEL  [SOT23]  135.95,77.42 180 top
Q13  MOSFET-PCHANNEL  [SOT23]  135.95,86.72 180 top
Q14  MOSFET-PCHANNEL  [SOT23]  135.95,96.04 180 top
Q15  MOSFET-PCHANNEL  [SOT23]  135.95,68.1 180 top
Q16  20 Mhz  [X22]  127.03,41.66 270 top
Q17  MOSFET-PCHANNEL  [SOT23]  129.25,45.95 270 bottom
Q18  20 Mhz  [X22]  160.9,11.29 0 top
R1  10K  [0402-RES]  168.03,100.91 90 top
R2  100K  [0402-RES]  161.89,87.5 270 top
R3  100K  [0402-RES]  162.95,71.3 270 top
R4  100K  [0402-RES]  163.43,56.8 270 top
R5  100K  [0402-RES]  163.28,106.75 90 top
R6  0R27  [R1206]  148.11,105.9 90 top
R7  5.6k  [0805]  154.61,104.2 90 top
R8  47k  [0805]  160.01,110.4 90 top
R9  0R27  [R1206]  148.11,57 90 top
R10  5.6k  [0805]  154.91,56.1 90 top
R11  47k  [0805]  162.01,61.5 90 top
R12  0R27  [R1206]  148.21,73 90 top
R13  5.6k  [0805]  155.31,71.5 90 top
R14  47k  [0805]  161.71,76.7 90 top
R15  0R27  [R1206]  148.11,89.7 90 top
R16  5.6k  [0805]  154.91,87.9 90 top
R17  47k  [0805]  161.51,93.3 90 top
R18  100K  [R0402]  134.68,61.08 270 top
R19  100K  [R0402]  132.14,61.08 270 top
R20  10K  [0805]  69.29,61.14 270 top
R21  4K7  [0805]  67.46,61.14 270 top
R22  100K  [R0402]  129.6,61.08 270 top
R23  4K7  [0805]  65.64,61.14 270 top
R24  100K  [R0402]  127.06,61.08 270 top
R25  680  [0805]  72.15,49.95 180 top
R26  120  [0805]  72.07,54.95 90 top
R27  680  [0805]  72.07,59.95 0 top
R28  47R  [0805]  70.24,65.11 180 top
R29  47R  [0805]  67.07,64.4 0 top
R30  15k  [R0402]  85.31,24.4 90 top
R31  150R  [R0402]  96.41,30.9 270 top
R32  150R  [R0402]  103.91,22.8 0 top
R33  33R  [R0402]  96.01,23.4 180 bottom
R34  33R  [R0402]  96.21,21.5 90 bottom
R35  150R  [R0402]  89.61,29.7 90 top
R36  150R  [R0402]  88.31,29.7 90 top
R37  SE14  [SE14]  11.52,117.7 0 bottom
R38  10K  [0402-RES]  32.63,103.51 90 top
R39  100K  [0402-RES]  13.43,108.3 270 top
R40  100K  [0402-RES]  13.35,110.8 270 top
R41  100K  [0402-RES]  25.13,110.8 90 top
R42  100K  [0402-RES]  25.08,108.15 90 top
R43  150k  [0805]  35.91,87 0 top
R44  33k  [0805]  35.91,88.7 180 top
R45  150R  [0805]  115.84,52.61 0 top
R46  150R  [0805]  115.83,54.31 0 top
R47  150R  [0805]  96.81,45.6 90 top
R48  150R  [0805]  96.41,54.1 90 top
R49  150R  [0805]  85.21,45.3 270 top
R50  68k  [0805]  34.11,92 180 top
R51  18k  [0805]  35.91,90.4 180 top
R52  [MINI_MELF-0207R]  4.61,116.6 90 top
R53  [MINI_MELF-0207R]  17.41,113.6 0 top
R54  [MINI_MELF-0207R]  29.61,114.4 180 top
R55  [MINI_MELF-0207R]  31.71,117.8 180 top
R56  [MINI_MELF-0207R]  8.11,116.6 270 top
R57  68k  [0402-RES]  17.91,95.2 0 top
R58  150R  [0805]  18.51,11.5 180 top
R59  150R  [0805]  18.51,13.9 180 top
R60  10K  [0805]  18.51,6.4 270 top
R61  330R  [0805]  26.01,12.2 0 top
R62  330R  [0805]  26.01,14 0 top
R63  330R  [0805]  21.61,26.7 270 top
R64  0R27  [R1206]  128.45,104.61 0 bottom
R65  5.6k  [R0402]  140.52,104.1 180 top
R66  47k  [R0402]  138.8,112.04 0 top
R67  0R27  [R1206]  128.45,77.94 0 bottom
R68  5.6k  [R0402]  140.55,76.32 180 top
R69  47k  [R0402]  138.8,84.1 0 top
R70  0R27  [R1206]  128.45,86.76 0 bottom
R71  5.6k  [R0402]  140.55,85.53 180 top
R72  47k  [R0402]  138.8,93.46 0 top
R73  0R27  [R1206]  128.45,95.45 0 bottom
R74  5.6k  [R0402]  140.55,94.89 180 top
R75  47k  [R0402]  138.8,102.67 0 top
R76  0R27  [R1206]  128.45,69.09 0 bottom
R77  5.6k  [R0402]  140.55,66.95 180 top
R78  47k  [R0402]  138.8,74.89 0 top
R79  100K  [R0402]  137.22,61.08 270 top
R80  1k  [R0402]  136.6,49.91 180 top
R81  100R  [R0402]  135.53,36.26 270 top
R82  100R  [R0402]  133.78,36.9 270 top
R83  [R0805]  161.61,48.08 270 top
R84  1k  [R0402]  152.64,20.86 270 top
R85  100R  [R0402]  166.3,19.79 0 top
R86  100R  [R0402]  165.66,18.04 0 top
R87  1k  [R0402]  167.01,20.1 90 bottom
R88  1k  [R0402]  167.01,17.33 90 bottom
R89  [R0402]  129.46,21.83 180 top
R90  [R0402]  130.9,23.38 0 top
R91  [R0402]  140.47,23.4 180 top
R92  [R0402]  140.47,24.73 180 top
R93  [R0402]  130.9,24.74 0 top
R94  [R0402]  137.83,16.19 270 bottom
R95  [R0402]  137.86,19.76 90 bottom
R96  [R0402]  73.28,7.36 0 top
R97  [R0402]  78.66,13.86 270 top
R+  SE14  [SE14]  145.11,65.7 90 top
R+1  SE14  [SE14]  124.01,111.26 270 top
R-  SE14  [SE14]  145.11,58.5 90 top
R-1  SE14  [SE14]  124.01,105.03 270 top
R_B  tbs  [0805]  92.3,60.35 0 top
R_B1  tbs  [0805]  114,60.35 0 top
R_G  tbs  [0805]  88.28,60.35 0 top
R_G1  tbs  [0805]  109.98,60.35 0 top
R_R  tbs  [0805]  81.82,112.14 90 top
R_R1  tbs  [0805]  103.52,112.14 90 top
R_U  tbs  [1206]  97.17,60.67 0 top
R_U1  tbs  [1206]  118.87,60.67 0 top
R_W  tbs  [1206]  83.45,60.67 180 top
R_W1  tbs  [1206]  105.15,60.67 180 top
RD1  [LED5MM]  82.92,107.06 270 top
RD2  [LED5MM]  97.86,110.22 270 top
RD3  [LED5MM]  92.88,100.73 270 top
RD4  [LED5MM]  87.9,97.56 270 top
RD5  [LED5MM]  92.88,81.74 270 top
RD6  [LED5MM]  87.9,78.57 270 top
RD7  [LED5MM]  97.86,72.24 270 top
RD8  [LED5MM]  82.92,69.08 270 top
RD9  [LED5MM]  104.62,107.06 270 top
RD10  [LED5MM]  119.56,110.22 270 top
RD11  [LED5MM]  114.58,100.73 270 top
RD12  [LED5MM]  109.6,97.56 270 top
RD13  [LED5MM]  114.58,81.74 270 top
RD14  [LED5MM]  109.6,78.57 270 top
RD15  [LED5MM]  104.62,69.08 270 top
RD16  [LED5MM]  119.56,72.24 270 top
RST  SWITCH_MCTAEF  [SWITCH_MCTAEF]  82.41,29.4 90 top
RX1  [CHIP-LED0805]  15.01,11.5 90 top
RX2  [CHIP-LED0805]  111.95,52.56 90 top
RXD1  [SMD1,27-2,54]  82.61,47.63 270 top
S1  BIND  [TACTILE_SWITCH_SMD]  177.01,24.63 270 bottom
S4  [TACTILE_SWITCH_SMD]  135.37,31.9 0 bottom
SBUS  [1X03_LONGPADS]  173.84,6.06 90 top
SG4  F/CM12P  [F/CM12P]  140.26,15.05 90 bottom
SJ1  [SJ_2S-NO]  73.58,84.32 90 top
SJ2  [SJ_2S-NO]  71.59,84.32 90 top
SJ3  [SJ_2S-NO]  69.61,84.32 90 top
SJ4  [SJ_2S-NO]  67.62,84.32 90 top
SJ5  [SJ_2S-NO]  65.64,84.32 90 top
SJ6  [SJ_2S-NO]  63.65,84.32 90 top
SJ7  [SJ_2S-NO]  61.67,84.32 90 top
SJ8  [SJ_2S-NO]  72.31,52.17 180 top
SJ9  [SJ_2S-NO]  72.15,57.73 180 top
SPEKTRUM_TX  [1X04_LONGPADS]  148.67,5.74 90 top
SV1  [FE05-2]  149.42,47.4 0 bottom
SV2  [MA04-1]  127.61,6.3 180 top
SW1  MCMT5-F-VADAPTED_FOOTPRINT  [MCMT5-F-V_ADAPTED]  71.04,112.58 45 top
SW2  SWITCH_MCTAEF  [SWITCH_MCTAEF]  101.51,25.7 0 top
SW3  [SMD2,54-5,08]  63.84,11.09 90 bottom
SW4  [SMD2,54-5,08]  63.93,7.79 270 bottom
T3  IRF7103  [SO-8]  8.9,108.87 180 top
T4  IRF7103  [SO-8]  29.46,110.08 0 top
TX1  [CHIP-LED0805]  15.01,13.9 90 top
TX2  [CHIP-LED0805]  111.95,54.34 90 top
TXD1  [SMD1,27-2,54]  82.61,52.71 270 top
U1  NICHIA_NSSL157T-H3  [PLCC2]  97.85,103.89 90 top
U1A  [LED5MM]  97.86,103.89 270 top
U1A1  [LED5MM]  119.56,103.89 270 top
U2  NICHIA_NSSL157T-H3  [PLCC2]  97.85,91.23 90 top
U2A  [LED5MM]  97.86,91.23 270 top
U2A1  [LED5MM]  119.56,91.23 270 top
U3  NICHIA_NSSL157T-H3  [PLCC2]  82.94,94.41 90 top
U3A  [LED5MM]  82.92,94.4 270 top
U3A1  [LED5MM]  104.62,94.4 270 top
U4  NICHIA_NSSL157T-H3  [PLCC2]  82.94,81.75 90 top
U4A  [LED5MM]  82.92,81.74 270 top
U4A1  [LED5MM]  104.62,81.74 270 top
U5  NICHIA_NSSL157T-H3  [PLCC2]  97.85,78.57 90 top
U5A  [LED5MM]  97.86,78.57 270 top
U5A1  [LED5MM]  119.56,78.57 270 top
U6  NICHIA_NSSL157T-H3  [PLCC2]  119.55,103.89 90 top
U7  NICHIA_NSSL157T-H3  [PLCC2]  119.55,91.23 90 top
U8  NICHIA_NSSL157T-H3  [PLCC2]  119.55,78.57 90 top
U9  NICHIA_NSSL157T-H3  [PLCC2]  104.64,81.75 90 top
U10  NICHIA_NSSL157T-H3  [PLCC2]  104.64,94.41 90 top
U$1  USB-MINIB-5PIN  [USB-MINIB]  101.31,22.2 0 bottom
U$2  SP0503BAHTG  [SOT143-R]  167.63,35.81 0 top
U$3  CP2105REAL  [S-PQFP-N24(RGE)]  160.82,40.34 180 top
U+  SE14  [SE14]  124.01,74.02 270 top
U-  SE14  [SE14]  124.01,67.8 270 top
VCC  [SMD2,54-5,08]  161.77,6.21 270 bottom
VCC1  [SMD2,54-5,08]  63.84,7.91 90 top
W1  NICHIA_NSSL157T-H3  [NICHIA_NSSL157T-H3]  97.86,84.9 90 top
W1A  [LED5MM]  97.86,84.9 270 top
W1A1  [LED5MM]  119.56,84.9 270 top
W2  NICHIA_NSSL157T-H3  [NICHIA_NSSL157T-H3]  97.86,97.56 90 top
W2A  [LED5MM]  97.86,97.56 270 top
W2A1  [LED5MM]  119.56,97.56 270 top
W3  NICHIA_NSSL157T-H3  [NICHIA_NSSL157T-H3]  82.92,100.73 90 top
W3A  [LED5MM]  82.92,100.73 270 top
W3A1  [LED5MM]  104.62,100.73 270 top
W4  NICHIA_NSSL157T-H3  [NICHIA_NSSL157T-H3]  82.92,88.07 90 top
W4A  [LED5MM]  82.92,88.07 270 top
W4A1  [LED5MM]  104.62,88.07 270 top
W5  NICHIA_NSSL157T-H3  [NICHIA_NSSL157T-H3]  82.92,75.41 90 top
W5A  [LED5MM]  82.92,75.41 270 top
W5A1  [LED5MM]  104.62,75.41 270 top
W6  NICHIA_NSSL157T-H3  [NICHIA_NSSL157T-H3]  119.56,97.56 90 top
W7  NICHIA_NSSL157T-H3  [NICHIA_NSSL157T-H3]  119.56,84.9 90 top
W8  NICHIA_NSSL157T-H3  [NICHIA_NSSL157T-H3]  104.62,75.41 90 top
W9  NICHIA_NSSL157T-H3  [NICHIA_NSSL157T-H3]  104.62,88.07 90 top
W10  NICHIA_NSSL157T-H3  [NICHIA_NSSL157T-H3]  104.62,100.73 90 top
W11  SE14  [SE14]  26.47,117.7 0 top
W+  SE14  [SE14]  145.11,114.55 90 top
W+1  SE14  [SE14]  124.01,83.32 270 top
W-  SE14  [SE14]  145.11,107.3 90 top
W-1  SE14  [SE14]  124.01,77.12 270 top
X1  RJ45-8L-B  [RJ45-NO-SHIELD]  172.05,114.66 180 top
X2  RJ45-8L-B  [RJ45-NO-SHIELD]  172.05,57.89 0 top
X3  MINI-USB-32005-301  [32005-301]  176.31,40.43 180 top
X4  2510-  [PAK100/2500-10]  149.77,34.5 0 bottom
X8  RJ45-8L-B  [RJ45-NO-SHIELD]  50.31,9.5 0 top
X9  RJ45-8L-B  [RJ45-NO-SHIELD]  50.31,116.5 180 top
X10  20 MHz  [HC49UP-SMALL]  77.39,84.32 270 top
X11  RJ45-8L-B  [RJ45-NO-SHIELD]  34.77,75.46 90 top
X12  USB-SMD-NS  [USB-MINIB-NOSTOP]  114.93,45.81 180 top
X13  RJ45-8L-B  [RJ45-NO-SHIELD]  8.1,75.71 270 top
X14  RJ45-8L-B  [RJ45-NO-SHIELD]  5.51,54.9 270 top
X15  RJ45-8L-B  [RJ45-NO-SHIELD]  37.21,54.9 90 top
X16  RJ45-8L-B  [RJ45-NO-SHIELD]  8.11,34.2 270 top
X17  RJ45-8L-B  [RJ45-NO-SHIELD]  34.81,34.2 90 top
X18  USB-SMD-NS  [USB-MINIB-NOSTOP]  34.41,10 90 top
XL  RJ45  [85502-5008-SMALL]  70.33,28.44 90 top
XR  RJ45  [85502-5008-SMALL]  70.33,112.58 270 top

## Library data of the parts
5V 5V1 +18_L +18_R A_L A_R ADC6 ADC7 B_L B_R C C_L D D_L GND GND2-GND4 GND_L GND_R LED+ LED- OUT P+5T P+5T1 P+5T2 P+18T P+18T1 P+18T2 PAD1-PAD5 PB0 PB1 PB1T PB1T1 PB1T2 PB2-PB5 PC0 PC1-PC3 PC3T PC3T1 PC3T2 PC4 PC4T PC4T1 PC4T2 PC5 PC5T PC5T1 PC5T2 PGNDT1-PGNDT3 RXD1 SW3 SW4 TXD1 VCC VCC1 = wirepad
+1 +5V1 B11 B+ B+1 B- B-1 G11 G+ G+1 G- G-1 GND1 R37 R+ R+1 R- R-1 U+ U- W11 W+ W+1 W- W-1 = solpad
B1-B10 G1-G10 JP1 RD1-RD16 U1A U1A1 U2A U2A1 U3A U3A1 U4A U4A1 U5A U5A1 W1A W1A1 W2A W2A1 W3A W3A1 W4A W4A1 W5A W5A1 X10 XL XR = Alex_personal
BIND FRAME LED1-LED8 RX1 RX2 TX1 TX2 = led
BL/SW2 D3-D10 IC3 IC6-IC8 IC11 IC16 IC21-IC25 IC31 L1-L4 L8 L9 L15 Q1 Q6 Q16 Q18 RST SW2 U1-U10 W1-W10 = seb
C1-C5 C7 C9 C11-C13 C15 C17 C18 C20 C22 C23 C25-C36 C42 C43 C45-C55 C57-C68 C70-C73 C75 C76 C79 C85 C88 C91 C94 C95 C100 C101 IC14 IC19 JP5 JP6 Q7-Q15 Q17 R1-R5 R7 R8 R10 R11 R13 R14 R16 R17 R20 R21 R23 R25-R29 R38-R51 R57-R63 R_B R_B1 R_G R_G1 R_R R_R1 R_U R_U1 R_W R_W1 S1 S4 SBUS SJ1-SJ9 SPEKTRUM_TX U$1 X12 X18 = SparkFun
C6 C8 C10 C14 C16 C19 C21 C24 C37-C41 C44 C74 C77 C78 C80 C82-C84 C86 C87 C89 C93 C96-C99 C102 C103 R6 R9 R12 R15 R18 R19 R22 R24 R30-R36 R52-R56 R64-R97 = rcl
C56 C69 C81 C90 C92 = resistor
D1 D2 D11-D18 = diode
IC1 IC15 IC32 = avr-7
IC2 IC13 IC20 = maxim; MF: MAXIM; MPN: MAX481CSA; OC_FARNELL: unknown; OC_NEWARK: 90C3817
IC4 IC10 IC17 IC18 IC33 = linear
IC5 = atmel; MPN: ATMEGA8-16AU; OC_FARNELL: 9171371; OC_NEWARK: 73M8863
IC9 = Alex_personal; MF: MAXIM; MPN: MAX487; OC_FARNELL: unknown; OC_NEWARK: unknown
IC12 = microbuilder; DIGIKEY#: 568-4945-ND; MANF: NXP; MANF#: LPC1343FBD48,151
IC26 IC28 = avr-4
IC27 = linear-technology
IC29 = linear-technology; MPN: LT1763CS8-1.5; OC_FARNELL: 1501016; OC_NEWARK: 57M6043
IC30 = linear-technology; MPN: LT1763CS8-3.3; OC_FARNELL: 1273617; OC_NEWARK: 57M6055
IC34 = atmel; MPN: ATTINY13V-10SU; OC_FARNELL: 9171584; OC_NEWARK: 96K6524
ISP ISP1 = atmel
ISP2 JP2 JP3 JP3A JP3B JP4 = pinhead-2
JP1T JP1T1 JP1T2 JP2T JP2T1 JP2T2 SV1 = con-lsta; OC_FARNELL: unknown; OC_NEWARK: unknown
L1A1 = seb; FARNELL: 1741367
L5 = seb; FARNELL: 1669987
L6 L7 = rc-master-smd
L10-L14 = wuerth-elektronik
OK4-OK8 = optocoupler; MF: AGILENT TECHNOLOGIES; MPN: HCPL-0601-000E; OC_FARNELL: 9995102; OC_NEWARK: 88H7776
Q2-Q5 = transistor-small-signal
SG4 = buzzer; OC_FARNELL: unknown; OC_NEWARK: unknown
SV2 = con-lstb; OC_FARNELL: unknown; OC_NEWARK: unknown
SW1 = alex3
T3 T4 = transistor-fet+irf7201
U$2 U$3 = pentabridgeparts
X1 X2 X8 X9 X11 X13-X17 = con-tycoelectronics; MF: TYCO ELECTRONICS; MPN: RJ45-8L-B; OC_FARNELL: 1279843; OC_NEWARK: 52K4445
X3 = con-cypressindustries; OC_FARNELL: unknown; OC_NEWARK: unknown
X4 = con-3m; MF: 3M; MPN: 2510-6002UB; OC_FARNELL: 9838244; OC_NEWARK: 46F4725

## Nets
1.8V: C92.+ C93.1 IC29.1 R87.2 SPEKTRUM_TX.4
1_4: IC12.40 JP4.7
1_5: IC12.45 JP4.6
2_6: IC12.1 JP4.2
3.3V: C76.1 C80.1 C81.+ IC26.4 IC26.6 IC27.1 IC27.2 LED3.A LED4.A Q17.2 R80.1
3.3V1: BIND.A C85.1 C95.1 C96.1 FRAME.A IC28.4 IC28.6 IC31.5 R84.1 SPEKTRUM_TX.3
3_3: IC12.48 JP4.3
5V: C79.1 IC27.5 IC27.8 JP6.2
7.4V: C88.1 IC30.5 IC30.8 VCC.1
!RE: IC1.9 IC2.2 IC2.3
!RE2: IC13.2 IC13.3 IC15.9
!RE3: IC20.2 IC20.3 OK8.6
!RST: IC1.29 ISP.5 R1.1
!RST1: IC15.29 ISP1.5 R38.1
+3V1: C40.2 C41.2 C43.1 C44.1 IC11.5 IC12.8 IC12.44 JP4.9 R30.2 R31.1 R32.2
+3V2: +5V1.MP C51.1 IC16.1 L1A1.P$1 L5.P$1 R43.2
+5V: C1.1 C2.1 C3.1 C12.2 IC1.4 IC1.6 IC1.18 IC2.8 IC4.1 ISP.2 R1.2
+5V1: 5V.1 C89.1 C90.+ C91.1 C94.1 IC29.5 IC29.8 IC30.1 IC30.2 IC31.1 IC31.3 SBUS.2
+5V2: C42.1 IC11.1 IC11.3 JP4.10 U$1.VBUS
+5V3: C47.1 C48.1 C49.1 C63.2 IC13.8 IC15.4 IC15.6 IC15.18 IC17.1 ISP1.2 R38.2
+5V4: C54.1 C56.+ C57.2 IC14.4 IC14.20 L6.2 OK6.2 OK7.8 R45.2 R46.2 R47.1
+5V5: C65.2 C71.1 C72.1 C73.1 IC18.1 IC20.8 OK4.7 OK4.8 OK8.7 OK8.8 R63.1
+5V6: C97.2 C101.2 C102.2 IC32.4 IC32.6 IC33.1 ISP2.2 L15.1 R89.2 R90.1 R91.1 R92.1 R93.1 SG4.-
+12V: C6.1 C8.1 C10.1 C13.2 C14.1 IC3.7 IC4.8 IC6.7 IC7.7 IC8.7 Q7.2 Q8.2 Q9.2 Q10.2 R8.2 R11.2 R14.2 R17.2 X1.4 X1.5 X2.4 X2.5
+12V1: C59.1 C60.1 C61.1 C62.2 IC16.4 IC17.8 X11.4 X11.5 X13.4 X13.5
+12V2: C100.2 IC33.8 R95.2 SV2.4
+18V: C16.1 C19.1 C21.1 C24.1 C74.1 IC21.7 IC22.7 IC23.7 IC24.7 IC25.7 JP1T2.7 P+18T2.1 Q11.2 Q12.2 Q13.2 Q14.2 Q15.2 R66.2 R69.2 R72.2 R75.2 R78.2
+18V1: +18_L.1 +18_R.1 C32.1 C37.+ IC10.8 JP1.7 PAD2.1 XL.4 XL.5 XR.4 XR.5
+18V2: +1.MP D11.A
+18V_PI1: D11.C X14.4 X14.5 X15.4 X15.5
+24V1: C64.2 IC18.8 X16.4 X16.5 X17.4 X17.5
+24V_SB: C23.+ C26.+ C27.+ C28.+ C29.+ C30.+ X8.4 X8.5 X9.4 X9.5
+USB_SIEVED1: C67.1 C69.+ C70.2 IC19.4 IC19.20 L7.2 OK5.7 OK5.8 R58.1 R59.1 R60.1 R61.1 R62.1
_VCC: JP2T.2 P+5T.1
_VCC1: JP2T1.2 P+5T1.1
_VCC2: JP2T2.2 P+5T2.1
A: IC2.6 X1.3 X2.3
A1_1: X8.3 X9.3
A2: IC13.6 X11.3 X13.3
A3: IC20.6 X16.3 X17.3
A_PI1: X14.3 X15.3
ADC0: IC5.23 PC0.1 SW1.1
ADC1: IC5.24 PC1.1 SW1.6
ADC2: IC5.25 PC2.1 SW1.4
ADR_DEC: IC5.12 PB0.1 SJ1.1 SJ2.1 SJ3.1 SJ4.1 SJ5.1 SJ6.1 SJ7.1
AGND: IC26.21
B: IC2.7 X1.6 X2.6
B1: JP2T2.3 PB1T2.1
B1_1: X8.6 X9.6
B2: JP2T.3 PB1T.1
B3: JP2T1.3 PB1T1.1
B4: IC13.7 X11.6 X13.6
B5: IC20.7 X16.6 X17.6
B_PI1: X14.6 X15.6
C3/ADC1: JP2T1.6 PC3T1.1
C3/ADC2: JP2T2.6 PC3T2.1
C3/ADC3: JP2T.6 PC3T.1
C4/ADC4/SDA: JP2T.5 PC4T.1
C4/ADC4/SDA1: JP2T1.5 PC4T1.1
C4/ADC4/SDA2: JP2T2.5 PC4T2.1
C5/ADC5/SCL: JP2T.4 PC5T.1
C5/ADC5/SCL1: JP2T1.4 PC5T1.1
C5/ADC5/SCL2: JP2T2.4 PC5T2.1
CTS_E: SV1.2 U$3.10
CTS_S: U$3.18 X4.8
DCD_S: U$3.24 X4.1
DSR_E: SV1.6 U$3.14
DSR_S: U$3.22 X4.6
DTR_E: SV1.8 U$3.15
DTR_S: U$3.23 X4.4
GND: C1.2 C2.2 C3.2 C4.1 C5.1 C6.2 C8.2 C10.2 C12.1 C13.1 C14.2 D1.A D2.A D12.A D13.A IC1.3 IC1.5 IC1.21 IC2.5 IC3.5 IC4.2 IC4.3 IC4.6 IC4.7 IC6.5 IC7.5 IC8.5 ISP.6 R2.2 R3.2 R4.2 R5.2 R6.1 R7.1 R9.1 R10.1 R12.1 R13.1 R15.1 R16.1 X1.1 X1.2 X2.1 X2.2
GND1: C18.1 C31.1 C32.2 C33.2 C34.2 C35.1 C36.1 C37.- GND_L.1 GND_R.1 IC5.3 IC5.5 IC5.21 IC9.5 IC10.2 IC10.3 IC10.6 IC10.7 JP1.1 JP2.1 JP3A.6 JP3B.6 PAD1.1 PAD5.1 R27.2 SW1.5 SW1.TAB1 SW1.TAB2 XL.1 XL.2 XR.1 XR.2
GND2: BL/SW2.1 C38.1 C39.1 C40.1 C41.1 C42.2 C43.2 IC11.2 IC12.5 IC12.41 JP4.8 RST.1 SW2.2 U$1.GND U$1.MTN1 U$1.MTN2 U$1.MTN3 U$1.MTN4
GND3: C45.1 C46.1 C47.2 C48.2 C49.2 C50.1 C51.2 C59.2 C60.2 C61.2 C62.1 C63.1 D10.A IC13.5 IC15.3 IC15.5 IC15.21 IC16.6 IC16.PAD IC17.2 IC17.3 IC17.6 IC17.7 ISP1.6 R39.2 R40.2 R41.2 R42.2 R44.1 R50.1 R57.1 T3.1 T3.3 T4.1 T4.3 X11.1 X11.2 X13.1 X13.2
GND4: C53.2 C54.2 C55.2 C56.- C57.1 IC14.7 IC14.18 IC14.21 IC14.25 IC14.26 OK7.5 X12.GND
GND5: C76.2 C77.1 C78.1 C79.2 C81.- IC26.3 IC26.5 IC27.3 IC27.6 IC27.7 JP5.1 JP6.1 S4.3 S4.4
GND6: C82.1 C83.1 C84.1 SV1.7 U$2.1 U$3.2 X3.5 X4.5
GND7: C85.2 C86.1 C87.1 C88.2 C90.- C91.2 C92.- C94.2 C95.2 GND.1 IC28.3 IC28.5 IC28.21 IC29.3 IC29.6 IC29.7 IC30.3 IC30.6 IC30.7 IC31.2 R88.1 S1.3 S1.4 SBUS.1 SPEKTRUM_TX.1
GND8: C97.1 C98.1 C99.1 C100.1 C101.1 IC32.3 IC32.5 IC32.21 IC33.2 IC33.3 IC33.6 IC33.7 ISP2.6 R94.2 SV2.1
GND9: C103.1 GND3.1 GND4.1 IC34.4
GND_AL1: C64.1 C65.1 C71.2 C72.2 C73.2 IC18.2 IC18.3 IC18.6 IC18.7 IC20.5 OK4.5 OK8.5 X16.1 X16.2 X17.1 X17.2
GND_PI1: GND1.MP X14.1 X14.2 X15.1 X15.2
GND_SB: C23.- C26.- C27.- C28.- C29.- C30.- X8.1 X8.2 X9.1 X9.2
GND_T: JP1T.1 JP2T.1 PGNDT1.1 Q2.2 Q3.2
GND_T1: JP1T1.1 JP2T1.1 PGNDT2.1 Q4.2 Q5.2
GND_T2: C16.2 C19.2 C21.2 C24.2 C74.2 D14.A D15.A D16.A D17.A D18.A IC21.5 IC22.5 IC23.5 IC24.5 IC25.5 JP1T2.1 JP2T2.1 PGNDT3.1 R18.2 R19.2 R22.2 R24.2 R64.1 R65.1 R67.1 R68.1 R70.1 R71.1 R73.1 R74.1 R76.1 R77.1 R79.2
GND_USB1: C66.2 C67.2 C68.2 C69.- C70.1 IC19.7 IC19.18 IC19.21 IC19.25 IC19.26 OK5.5 X18.GND
LED_B: D3.1 IC5.9 JP1.4
LED_G: D4.1 IC5.2 JP1.3
LED_R: D5.1 IC5.1 JP1.2
LED_U: D9.1 IC5.11 JP1.6
LED_W: D8.1 IC5.10 JP1.5
MISO: IC1.16 ISP.1
MISO1: IC5.16 JP3A.1 JP3B.1 PB4.1
MISO2: IC15.16 ISP1.1
MISO3: IC32.16 ISP2.1
MOSI: IC1.15 ISP.4
MOSI1: IC5.15 JP3A.4 JP3B.4 PB3.1
MOSI2: IC15.15 ISP1.4
MOSI3: IC32.15 ISP2.4
N$1: C7.1 IC3.3 R6.2 W-.MP
N$2: C7.2 L1.P$2 W+.MP
N$3: D2.C IC3.1 L1.P$1 Q7.3
N$4: C9.1 IC6.3 R9.2 R-.MP
N$5: IC3.4 R7.2
N$6: C9.2 L2.P$2 R+.MP
N$7: IC3.8 R8.1
N$8: D1.C IC6.1 L2.P$1 Q8.3
N$9: IC6.4 R10.2
N$10: IC3.6 Q7.1
N$11: IC6.8 R11.1
N$12: IC6.6 Q8.1
N$13: C11.1 G-.MP IC7.3 R12.2
N$14: C11.2 G+.MP L8.P$2
N$15: D12.C IC7.1 L8.P$1 Q9.3
N$16: IC7.4 R13.2
N$17: IC7.8 R14.1
N$18: X1.7 X2.7
N$19: X1.8 X2.8
N$20: IC7.6 Q9.1
N$21: B-.MP C15.1 IC8.3 R15.2
N$22: B+.MP C15.2 L9.P$2
N$23: D13.C IC8.1 L9.P$1 Q10.3
N$24: IC8.4 R16.2
N$25: IC8.8 R17.1
N$26: IC8.6 Q10.1
N$29: C17.1 IC21.3 R64.2 R-1.MP
N$30: C17.2 L10.1 R+1.MP
N$31: D14.C IC21.1 L10.2 Q11.3
N$32: IC21.4 R65.2
N$33: X8.8 X9.8
N$34: X8.7 X9.7
N$35: IC21.8 R66.1
N$36: IC5.30 IC9.1
N$37: IC21.6 Q11.1
N$38: C18.2 IC5.8 X10.2
N$39: C31.2 IC5.7 X10.1
N$40: ADC6.1 IC5.19
N$41: ADC7.1 IC5.22
N$42: C35.2 IC5.18 L3.2
N$43: C36.2 IC5.20
N$44: C20.1 IC22.3 R67.2 W-1.MP
N$45: D7.2 SJ1.2
N$46: D6.2 SJ2.2
N$47: D5.2 SJ3.2
N$48: D4.2 SJ4.2
N$49: R25.2 R26.1 SJ8.2
N$50: D3.2 SJ5.2
N$51: D8.2 SJ6.2
N$52: D9.2 SJ7.2
N$53: R26.2 R27.1 SJ9.2
N$54: IC5.28 R29.2
N$55: IC5.14 PB2.1
N$56: C.1 C_L.1 XL.7 XR.7
N$57: D.1 D_L.1 XL.8 XR.8
N$58: R_W.2 W5.K@1 W5A.K
N$59: IC5.27 R28.2
N$60: U1.P$1 U1A.K U2.P$2 U2A.A
N$61: G1.K G2.A
N$62: G2.K G3.A
N$63: G3.K G4.A
N$64: G4.K G5.A
N$65: G5.K R_G.2
N$66: B1.K B2.A
N$67: B2.K B3.A
N$68: B3.K B4.A
N$69: B4.K B5.A
N$70: B5.K R_B.2
N$71: RD1.K RD2.A
N$72: RD2.K RD3.A
N$73: RD3.K RD4.A
N$74: RD4.K RD5.A
N$75: RD5.K RD6.A
N$76: Q3.3 R_W.1
N$77: JP1T.6 Q2.1
N$78: JP1T.5 Q3.1
N$79: JP1T.3 R_G.1
N$80: JP1T.4 R_B.1
N$81: JP1T.2 RD8.K
N$82: R_R.1 RD1.A
N$83: RD6.K RD7.A
N$84: RD7.K RD8.A
N$85: W4.K@1 W4A.K W5.A@2 W5A.A
N$86: W3.K@1 W3A.K W4.A@2 W4A.A
N$87: W2.K@1 W2A.K W3.A@2 W3A.A
N$88: W1.K@1 W1A.K W2.A@2 W2A.A
N$89: R_U.2 U5.P$1 U5A.K
N$90: U4.P$1 U4A.K U5.P$2 U5A.A
N$91: U3.P$1 U3A.K U4.P$2 U4A.A
N$92: U2.P$1 U2A.K U3.P$2 U3A.A
N$93: Q2.3 R_U.1
N$94: R_W1.2 W5A1.K W8.K@1
N$95: U1A1.K U2A1.A U6.P$1 U7.P$2
N$96: G6.K G7.A
N$97: G7.K G8.A
N$98: G8.K G9.A
N$99: G9.K G10.A
N$100: G10.K R_G1.2
N$101: B6.K B7.A
N$102: B7.K B8.A
N$103: B8.K B9.A
N$104: B9.K B10.A
N$105: B10.K R_B1.2
N$106: RD9.K RD10.A
N$107: RD10.K RD11.A
N$108: RD11.K RD12.A
N$109: RD12.K RD13.A
N$110: RD13.K RD14.A
N$111: Q5.3 R_W1.1
N$112: JP1T1.6 Q4.1
N$113: JP1T1.5 Q5.1
N$114: JP1T1.3 R_G1.1
N$115: JP1T1.4 R_B1.1
N$116: JP1T1.2 RD15.K
N$117: R_R1.1 RD9.A
N$118: RD14.K RD16.A
N$119: RD15.A RD16.K
N$120: W4A1.K W5A1.A W8.A@2 W9.K@1
N$121: W3A1.K W4A1.A W9.A@2 W10.K@1
N$122: W2A1.K W3A1.A W6.K@1 W10.A@2
N$123: W1A1.K W2A1.A W6.A@2 W7.K@1
N$124: R_U1.2 U5A1.K U8.P$1
N$125: U4A1.K U5A1.A U8.P$2 U9.P$1
N$126: U3A1.K U4A1.A U9.P$2 U10.P$1
N$127: U2A1.K U3A1.A U7.P$1 U10.P$2
N$128: Q4.3 R_U1.1
N$129: C38.2 IC12.7 L4.1
N$130: C39.2 IC12.6 L4.3
N$131: IC12.3 JP4.1 R30.1 RST.2
N$132: IC12.32 JP3.1
N$133: IC12.29 JP3.2
N$134: IC12.28 JP3.3
N$135: IC12.27 JP3.4
N$136: IC12.23 JP3.5
N$137: IC12.22 JP3.6
N$138: IC12.14 JP3.9
N$139: IC12.10 JP3.10
N$140: C44.2 IC11.4
N$141: LED1.A R31.2
N$142: IC12.36 LED1.C
N$143: BL/SW2.2 IC12.4
N$144: IC12.35 SW2.1
N$145: LED2.A R32.1
N$146: IC12.33 LED2.C
N$147: R34.2 U$1.D+
N$148: R33.2 U$1.D-
N$149: IC12.19 R33.1
N$150: IC12.20 R34.1
N$151: IC12.46 R35.1
N$152: IC12.47 R36.1
N$153: R52.1 T3.8
N$154: R53.1 T3.5
N$155: R54.1 T4.8
N$156: G11.MP R53.2
N$157: B11.MP R54.2
N$158: R55.2 W11.MP
N$159: R55.1 T4.5
N$160: IC16.10 R50.2
N$161: C50.2 R51.1
N$162: IC16.9 R51.2
N$163: C52.1 D10.K IC16.3 L1A1.P$2 L5.P$2
N$164: IC16.8 R43.1 R44.2
N$165: C52.2 IC16.2
N$166: IC15.12 IC16.5 R57.2
N$167: R52.2 R56.1
N$168: R37.MP R56.2
N$169: IC14.16 X12.D-
N$170: IC14.15 X12.D+
N$171: R45.1 RX2.A
N$172: R46.1 TX2.A
N$173: C55.1 IC14.17
N$174: IC14.22 RX2.C
N$175: IC14.23 TX2.C
N$176: C53.1 L6.1 X12.VBUS
N$178: IC14.14 R47.2
N$179: C58.2 GND2.1 OK6.5
N$180: 5V1.1 C58.1 OK6.8 OK7.3
N$181: OK6.6 TXD1.1
N$182: OK6.3 R48.1
N$183: OK7.2 R49.2
N$184: R49.1 RXD1.1
N$185: X11.7 X13.7
N$186: X11.8 X13.8
N$187: X14.7 X15.7
N$188: X14.8 X15.8
N$189: X16.8 X17.8
N$190: X16.7 X17.7
N$191: IC19.16 X18.D-
N$192: IC19.15 X18.D+
N$193: R58.2 RX1.A
N$194: R59.2 TX1.A
N$195: C68.1 IC19.17
N$196: IC19.22 RX1.C
N$197: IC19.23 TX1.C
N$198: C66.1 L7.1 X18.VBUS
N$199: IC19.14 R60.2
N$200: OK5.2 R63.2
N$201: OK4.2 R61.2
N$202: OK8.2 R62.2
N$203: IC19.13 OK8.3
N$204: C20.2 L11.1 W+1.MP
N$205: D15.C IC22.1 L11.2 Q12.3
N$206: IC22.4 R68.2
N$207: IC22.8 R69.1
N$208: IC22.6 Q12.1
N$209: B-1.MP C22.1 IC23.3 R70.2
N$210: B+1.MP C22.2 L12.1
N$211: D16.C IC23.1 L12.2 Q13.3
N$212: IC23.4 R71.2
N$213: IC23.8 R72.1
N$214: IC23.6 Q13.1
N$215: C25.1 G-1.MP IC24.3 R73.2
N$216: C25.2 G+1.MP L13.1
N$217: D17.C IC24.1 L13.2 Q14.3
N$218: IC24.4 R74.2
N$219: IC24.8 R75.1
N$220: IC24.6 Q14.1
N$221: C75.1 IC25.3 R76.2 U-.MP
N$222: C75.2 L14.1 U+.MP
N$223: D18.C IC25.1 L14.2 Q15.3
N$224: IC25.4 R77.2
N$225: IC25.8 R78.1
N$226: IC25.6 Q15.1
N$227: IC26.29 R80.2
N$228: C78.2 IC26.8 Q16.1
N$229: C77.2 IC26.7 Q16.3
N$230: IC26.14 JP6.3
N$231: LED3.C R81.2
N$232: IC26.13 R81.1
N$233: IC26.30 JP5.3
N$234: C80.2 IC27.4
N$235: IC26.15 S4.1 S4.2
N$236: IC26.1 Q17.1
N$237: JP5.2 Q17.3
N$238: LED4.C R82.2
N$239: IC26.10 R82.1
N$240: U$2.4 U$3.4 X3.2
N$241: U$2.2 U$3.3 X3.3
N$242: R83.2 U$3.9
N$243: IC28.29 R84.2
N$244: C87.2 IC28.8 Q18.1
N$245: C86.2 IC28.7 Q18.3
N$246: FRAME.C R85.2
N$247: IC28.13 R85.1
N$248: C89.2 IC30.4
N$249: IC28.15 S1.1 S1.2
N$250: BIND.C R86.2
N$251: IC28.10 R86.1
N$252: C93.2 IC29.4
N$253: C96.2 IC31.4
N$254: IC28.30 SBUS.3
N$255: IC29.2 R87.1 R88.2
N$256: C99.2 IC32.20
N$257: C98.2 IC32.18 L15.2
N$258: LED5.A R93.2
N$259: LED6.A R92.2
N$260: LED7.A R91.2
N$261: LED8.A R90.2
N$262: C102.1 IC32.11 SG4.+
N$263: IC32.24 LED7.C
N$264: IC32.25 LED6.C
N$265: IC32.26 LED5.C
N$266: IC32.23 R94.1 R95.1
N$267: IC32.27 LED8.C
N$268: IC34.1 R96.2
N$269: IC34.3 R97.2
N$270: LED-.1 R97.1
N$271: IC34.5 OUT.1
N$272: IC34.6 SW3.1
N$273: IC34.7 SW4.1
PB: IC1.26 IC8.2 R2.1
PB1: IC15.26 R41.1 T4.2
PG: IC1.27 IC7.2 R3.1
PG1: IC15.27 R40.1 T3.4
PR: IC1.28 IC6.2 R4.1
PR1: IC15.28 R39.1 T3.2
PW: IC1.25 IC3.2 R5.1
PW1: IC15.25 R42.1 T4.4
RE/DE: D6.1 IC5.32 IC9.2 IC9.3
RI_E: SV1.10 U$3.17
RI_S: U$3.1 X4.9
RS485A: A_L.1 A_R.1 IC9.6 SJ9.1 XL.3 XR.3
RS485B: B_L.1 B_R.1 IC9.7 SJ8.1 XL.6 XR.6
RST: IC5.29 JP3A.5 JP3B.5 R20.1
RST1: IC32.29 ISP2.5 R89.1
RTS_E: SV1.4 U$3.11
RTS_S: U$3.19 X4.7
RX: JP4.5 R35.2
RX_E: SV1.5 U$3.12
RX_S: U$3.20 X4.2
RXD: IC1.30 IC2.1
RXD2: IC13.1 IC15.30
RXD3: IC14.5 OK7.6
RXD4: IC20.1 OK5.3
RXD_AL1: IC19.5 OK5.6
SCK: IC1.17 ISP.3
SCK1: IC5.17 JP3A.3 JP3B.3 PB5.1
SCK2: IC15.17 ISP1.3
SCK3: IC32.17 ISP2.3
SCL: IC12.15 JP3.8
SDA: IC12.16 JP3.7
SPARE_B1: IC5.13 JP2.3 PB1.1 SW1.2
SPARE_C3: IC5.26 JP2.6 PC3.1 SW1.3
SPARE_C4: JP2.5 PC4.1 R21.1 R28.1
SPARE_C5: JP2.4 PC5.1 R23.1 R29.1
SPEC_RX: IC28.31 SPEKTRUM_TX.2
T_B: IC23.2 JP1T2.4 R19.1
T_G: IC24.2 JP1T2.3 R22.1
T_R: IC21.2 JP1T2.2 R24.1
T_U: IC25.2 JP1T2.6 R79.1
T_W: IC22.2 JP1T2.5 R18.1
TX: JP4.4 R36.2
TX_E: SV1.3 U$3.13
TX_S: U$3.21 X4.3
TXD: IC1.31 IC2.4
TXD2: D7.1 IC5.31 IC9.4
TXD3: IC13.4 IC15.31
TXD4: IC14.1 R48.2
TXD5: IC20.4 OK4.6
TXD_AL1: IC19.1 OK4.3
V+: B1.A G1.A JP1T.7 P+18T.1 R_R.2 U1.P$2 U1A.A W1.A@2 W1A.A
V+1: B6.A G6.A JP1T1.7 P+18T1.1 R_R1.2 U1A1.A U6.P$2 W1A1.A W7.A@2
VBUS: C84.2 U$2.3 U$3.7 U$3.8 X3.1
VCC: C33.1 C34.1 IC5.4 IC5.6 IC9.8 IC10.1 JP2.2 L3.1 PAD3.1 PAD4.1 R20.2 R21.2 R23.2 R25.1
VCC1: C82.2 C83.2 R83.1 SV1.1 U$3.5 U$3.6
VCC2: C103.2 IC34.8 LED+.1 R96.1 VCC1.1
XTAL1: C5.2 IC1.7 Q1.3
XTAL2: C4.2 IC1.8 Q1.1
XTAL3: C45.2 IC15.7 Q6.3
XTAL4: C46.2 IC15.8 Q6.1

## Tracks (layer width: path | path; a pad name or v marks a point on that pad's centre or on a via)
1.8V  (via drill 0.5)
  Top 0.406: v145.18,17.09 145.18,25.11 148.28,28.2 167.64,28.2 169.15,26.69 169.15,22.64 v169.55,22.25
  Bottom 0.406: C92.+ 171.52,25.24 C93.1 170.66,22.64 170.26,22.25 | SPEKTRUM_TX.4 148.83,13.44 v145.18,17.09 | 170.26,22.25 v169.55,22.25 168.99,21.69 IC29.1 169.03,20.75 R87.2 | 170.26,22.25
1_4
  Top 0.254: JP4.7 97.02,33.81 96.51,33.3 96.01,33.3 95.11,32.4 95.11,30.3 94.91,30.1 94.91,28.7 93.71,27.5 93.61,27.5 93.06,26.95 IC12.40
1_5
  Top 0.254: JP4.6 94.48,33.01 94.11,32.64 93.55,32.64 92.41,31.5 91.51,31.5 90.56,30.55 IC12.45
2_6
  Top 0.254: JP4.2 84.42,35.55 84.42,32.69 86.11,31 86.11,27.8 87.51,26.4 IC12.1
3.3V  (via drill 0.4)
  Top 0.254: 130.05,43.96 IC26.4 | 130.05,43.96 130.05,42.36 IC26.6 136.99,42.36 v136.99,42.45 | R80.1 137.74,49.91 v138.46,49.91 | 130.05,43.96 129.97,44.04 129.57,44.04 128.96,44.65 C76.1 | v131.24,36.98 131.7,36.98 LED4.A LED3.A
  Bottom 0.254: v138.46,49.91 136.99,48.37 136.99,45.63
  Bottom 0.406: 136.87,41.58 C80.1 137.8,40.97 138.38,40.39 138.38,37.85 137.51,36.98 v131.24,36.98 | 136.87,41.58 IC27.2 | 136.99,42.93 v136.99,42.45 136.99,41.18 136.87,41.58 | IC27.1 134.16,42.93 136.99,42.93 | 136.99,42.93 136.99,45.63 136.99,45.91 C81.+ 135.29,45 Q17.2
3.3V1  (via drill 0.4, 0.5)
  Top 0.254: 158.59,14.31 IC28.4 | 158.59,14.31 160.19,14.31 IC28.6 160.19,21.26 v159.07,21.26 | R84.1 152.64,22 v152.64,22.72 | 158.59,14.31 158.52,14.23 158.52,13.83 157.91,13.23 C85.1 | v165.58,15.5 165.58,15.96 BIND.A FRAME.A